# Altium PCB Main.PcbDoc (part 1 of 2)
Units mil, origin at the board's own origin, x right, y up, seen from the top; angles counter-clockwise.
Board outline 1000 x 1000 mil, 4 copper layers (Top Layer, VCC, GND, Bottom Layer), stack 62.669 mil thick; 79 components, 78 nets, 304 pads, 168 vias.
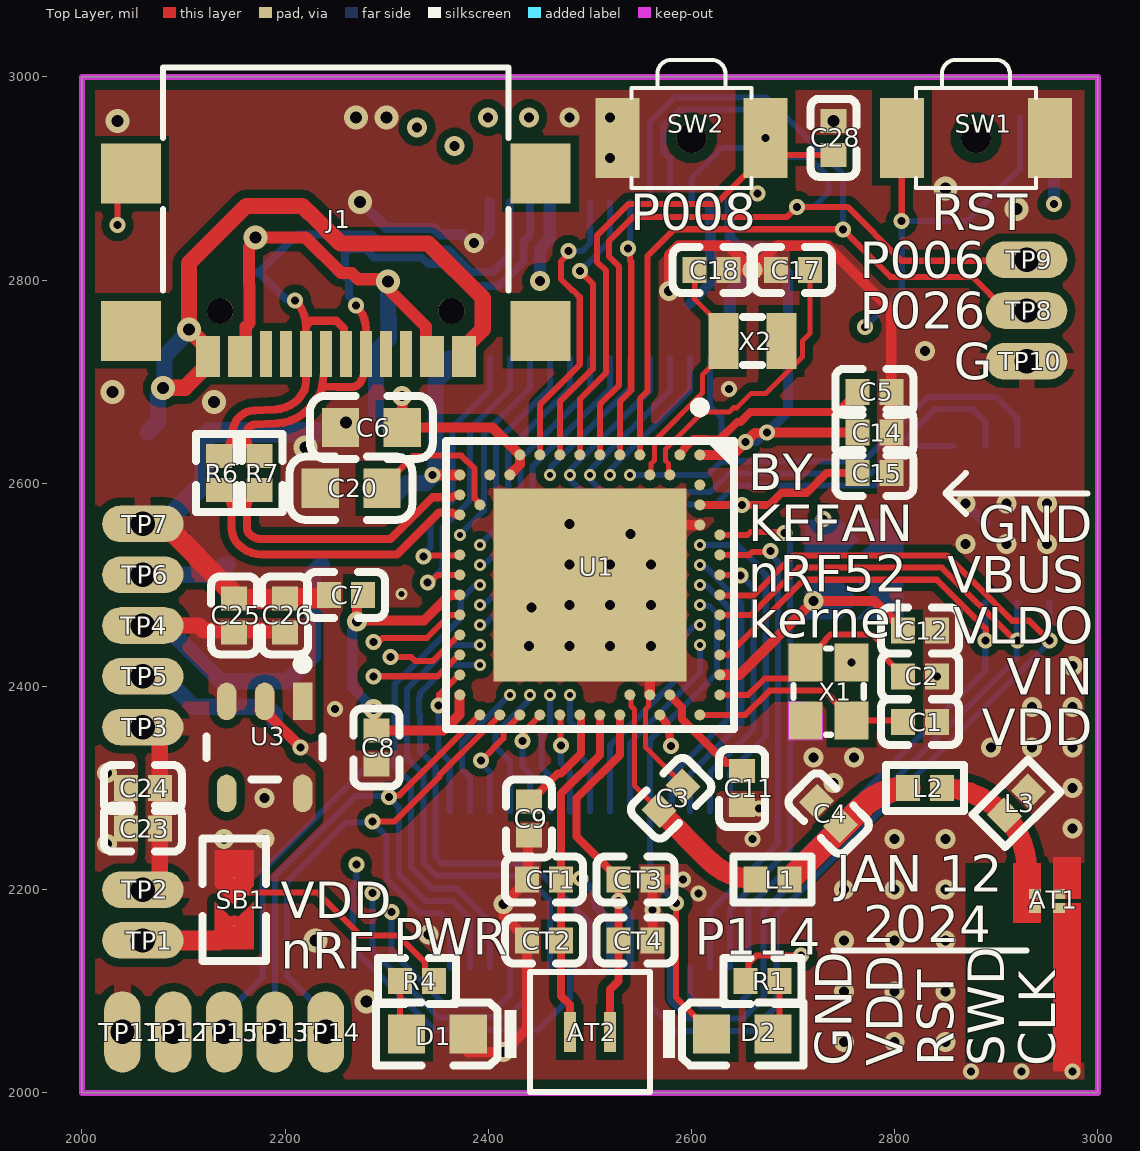
[diagram p0: Top Layer view]
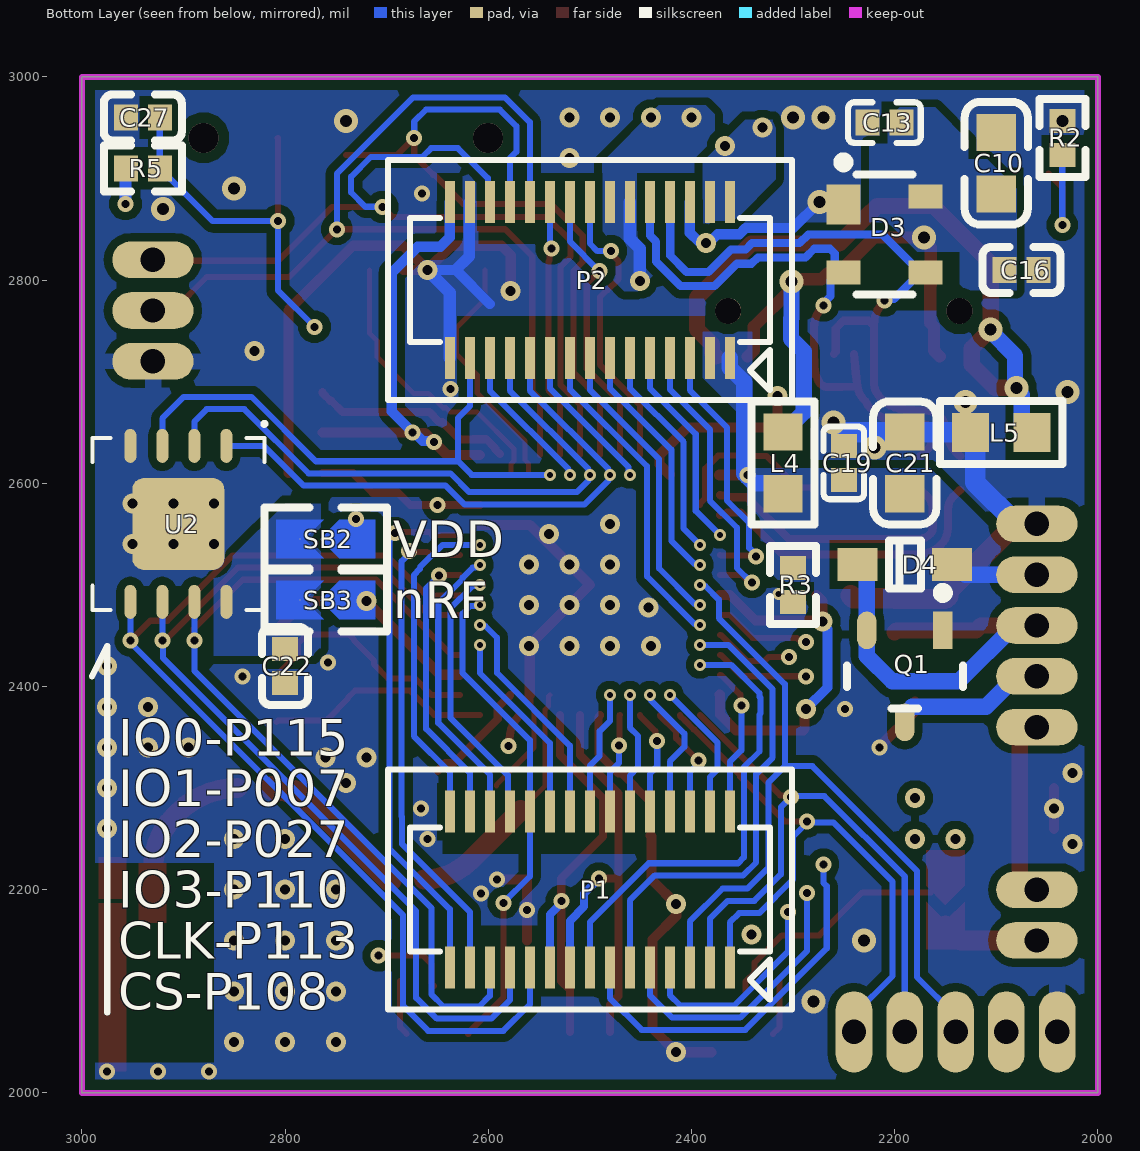
[diagram p1: Bottom Layer view, seen from below]
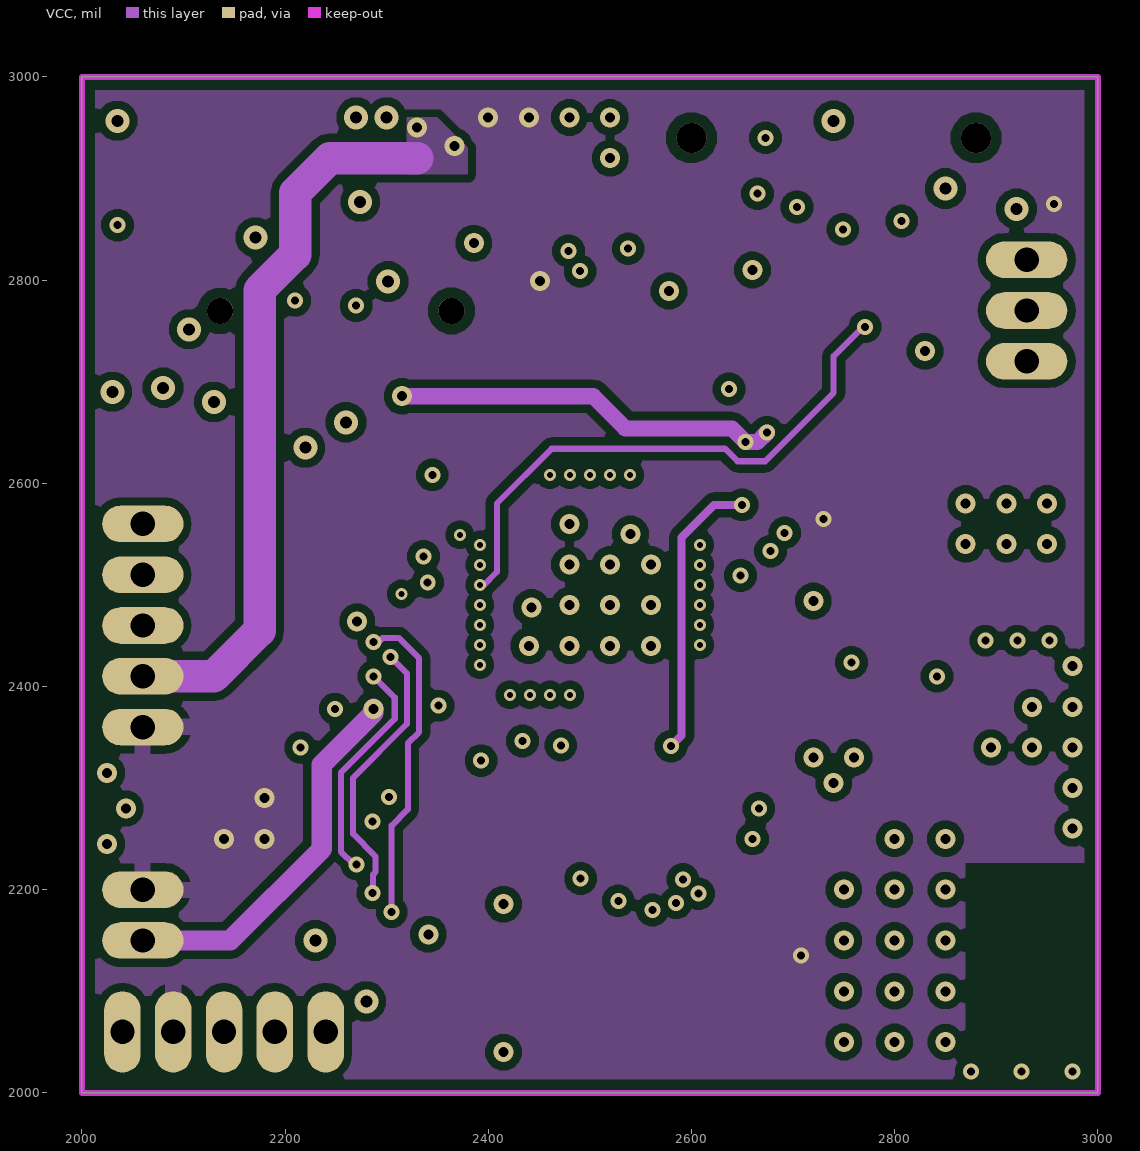
[diagram p2: VCC]
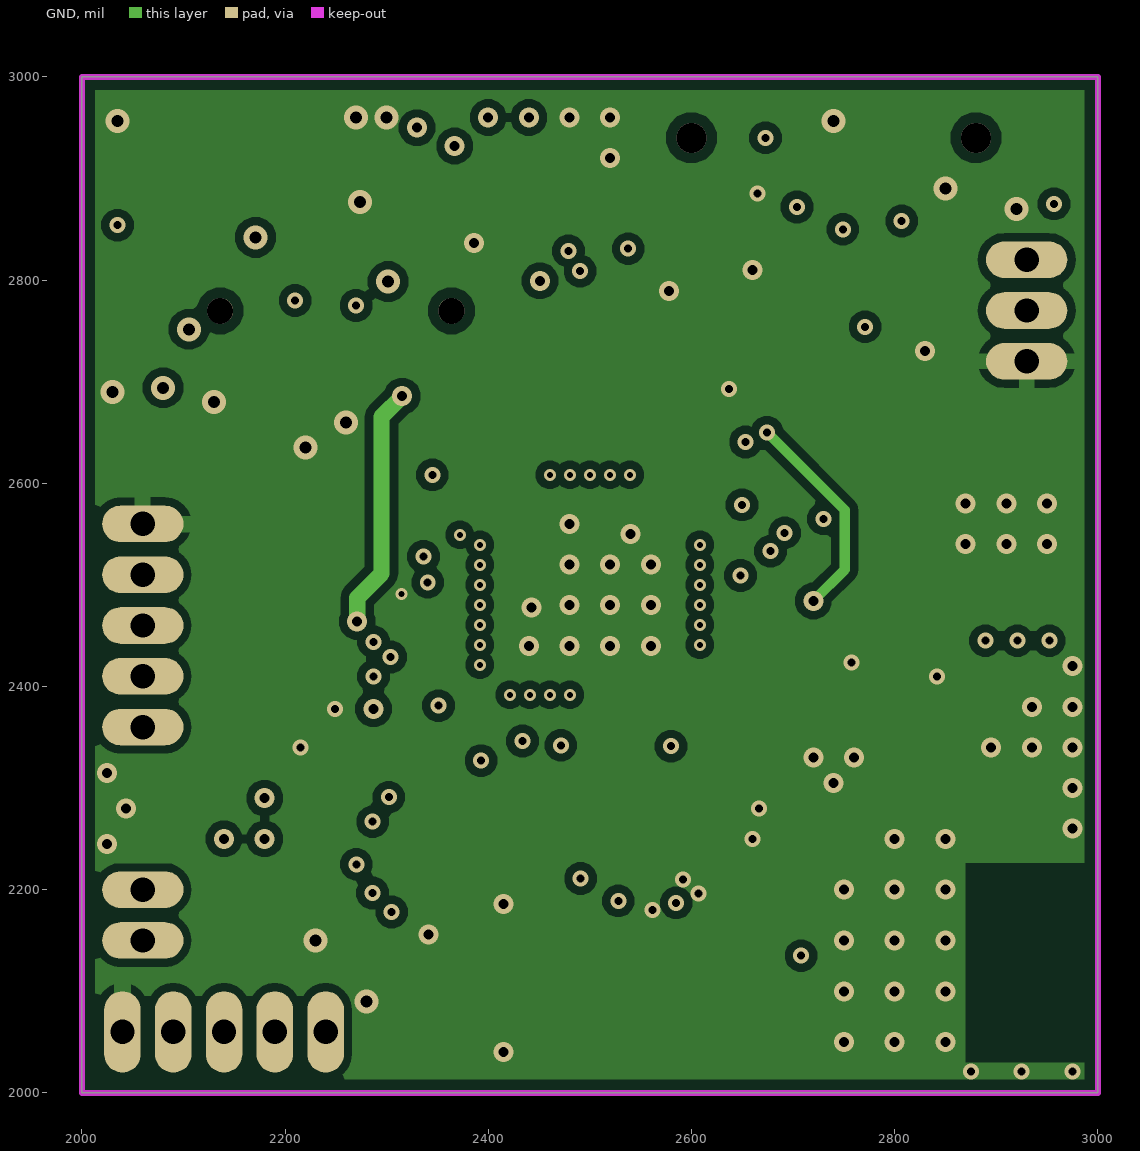
[diagram p3: GND]
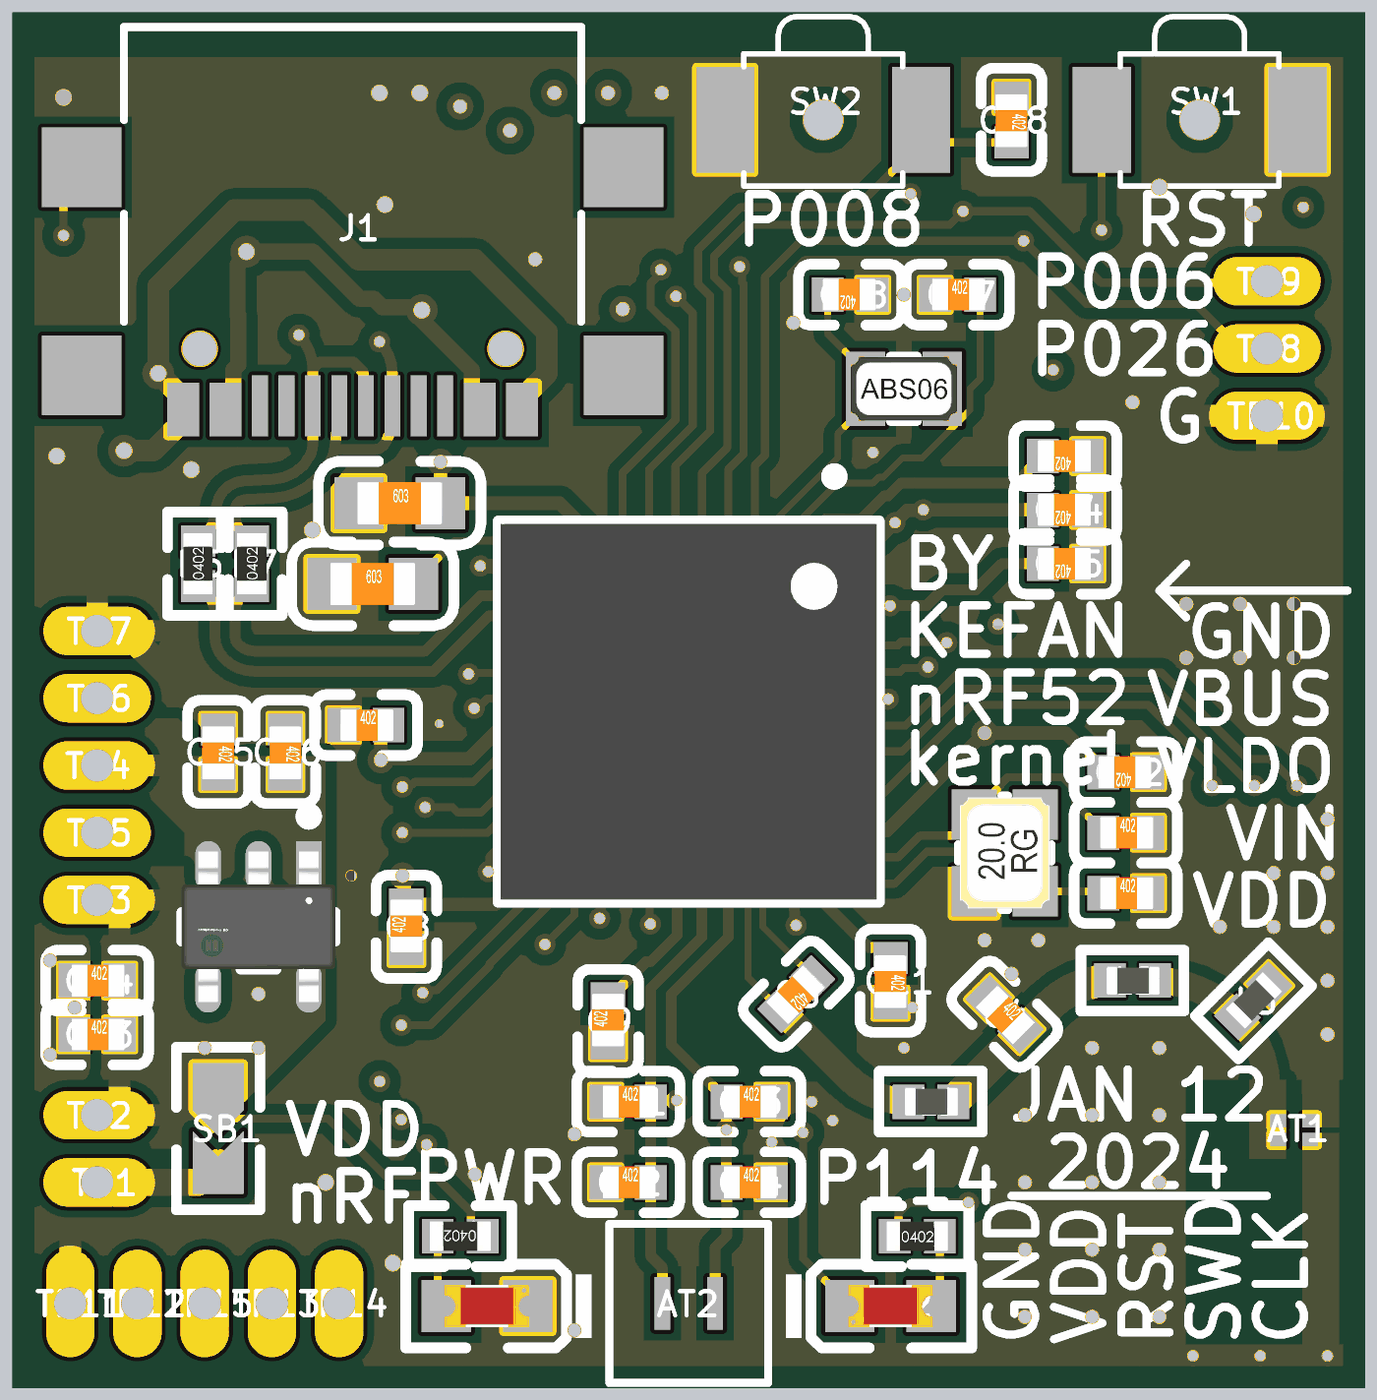
[diagram p4: 3D render of the assembled board from above, using the file's embedded part models]
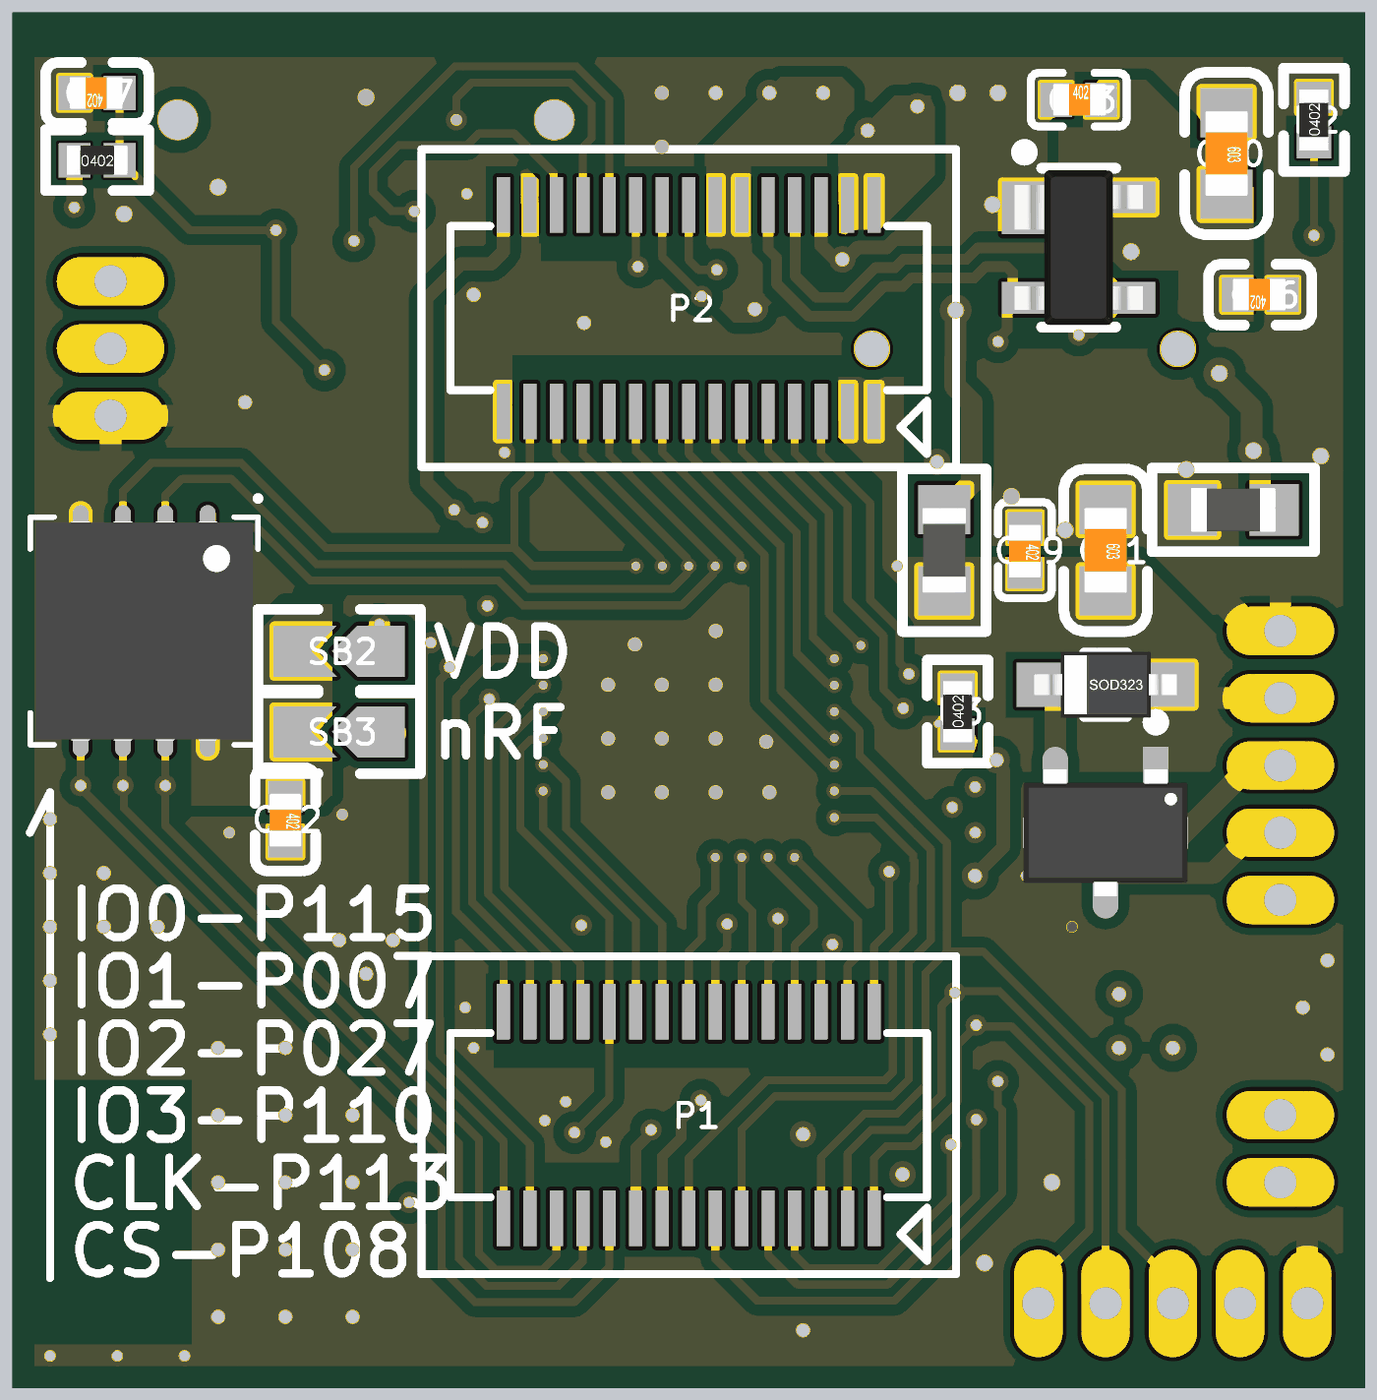
[diagram p5: 3D render of the assembled board from below, using the file's embedded part models]

## Layer stack, top to bottom
Top Solder: solder mask 0.4, Solder Resist, Dk 3.5
Top Layer: signal copper 1.378
Dielectric 2: prepreg 8.2835, PP-022, Dk 4.5
VCC: signal copper 0.7087
Dielectric 1: dielectric 41.9291, FR-4, Dk 4.8
GND: signal copper 0.7087
Dielectric 3: prepreg 8.2835, PP-022, Dk 4.5
Bottom Layer: signal copper 1.378
Bottom Solder: solder mask 0.4, Solder Resist, Dk 3.5

## Board outline
2000,2000 3000,2000 3000,3000 2000,3000

## Design rules (kind name [scope] priority, off if disabled: settings)
Clearance Polygon_ANT [(InNamedPolygon('Top_Layer-GND')) or  (InNamedPolygon('Mid_Layer_1-GND')) or (InNamedPolygon('Mid_Layer_2-GND')) or (InNamedPolygon('Bottom_Layer-GND')) vs InNet('RF')] p1: gap=10 ignorepadtopadclearanceinfootprint=FALSE
Clearance Polygon [(InNamedPolygon('Top_Layer-GND')) or  (InNamedPolygon('Mid_Layer_1-GND')) or (InNamedPolygon('Mid_Layer_2-GND')) or (InNamedPolygon('Bottom_Layer-GND'))] p2: gap=10 ignorepadtopadclearanceinfootprint=FALSE except(0: Arc-Hole Track-Hole SMDPad-Hole THPad-Hole Via-Hole Fill-Hole Poly-Hole Region-Hole Text-Hole)
Clearance Clearance_Top [OnLayer('Top Layer')] p3: gap=5.71 ignorepadtopadclearanceinfootprint=FALSE except(0: Arc-Hole Track-Hole SMDPad-Hole THPad-Hole Via-Hole Fill-Hole Poly-Hole Region-Hole Text-Hole)
Clearance [All] p4: gap=5.91 ignorepadtopadclearanceinfootprint=FALSE
ComponentClearance [All] p1 off: gap=10 collisioncheckmode=3 verticalgap=10 showdistances=FALSE
DiffPairsRouting [All] p1: maxlimit=15 minlimit=6 mostfreqgap=8 toplayer_minwidth=5 toplayer_maxwidth=20 toplayer_prefwidth=6 midlayer1_minwidth=5 midlayer1_maxwidth=20 midlayer1_prefwidth=6 midlayer2_minwidth=5 midlayer2_maxwidth=20 midlayer2_prefwidth=6 bottomlayer_minwidth=5 bottomlayer_maxwidth=20 bottomlayer_prefwidth=6 maxuncoupledlength=500
FabricationTestPointUsage TestPointUsage [All] p1: valid=0 allowmultiple=FALSE
FabricationTestpoint Testpoint [All] p1: side=3 testpointundercomponent=TRUE minsize=40 maxsize=100 preferedsize=60 minholesize=0 maxholesize=40 preferedholesize=32 testpointgrid=1 allowsidetop=TRUE allowsidebottom=TRUE usegrid=TRUE gridtolerance=0.01
Height [All] p1 off: minheight=0 maxheight=1000 prefheight=500
HoleSize [All] p1: absolutevalues=TRUE maxlimit=160 minlimit=3.94 maxpercent=80.000 minpercent=20.000
MinimumAnnularRing [All] p1 off: minimumring=6
PolygonConnect PolygonConnect_1 [isVia and innet(gnd)] p1: connectstyle=Direct reliefconductorwidth=10 reliefentries=4 polygonreliefangle="90 Angle" airgapwidth=10
PolygonConnect [All] p2: connectstyle=Relief reliefconductorwidth=10 reliefentries=4 polygonreliefangle="90 Angle" airgapwidth=10
RoutingVias [All] p1: holewidth=5.91 width=11.81 viastyle="Through Hole" minholewidth=5.91 minwidth=11.81 maxholewidth=236.22 maxwidth=248.03
SilkToSolderMaskClearance SilkscreenOverComponentPads [IsPad] p1: minsilkscreentomaskgap=10 clearancetoexposedcopper=TRUE
SolderMaskExpansion [All] p1: expansion=3 istentingtop=FALSE
Width [All] p1: maxlimit=64 minlimit=3.5 preferedwidth=5
23 further rules are at their usual default settings.

## Classes and differential pairs
component class Collection: P1 P2 R6 R7
component class Designator: C22 C23 C24 C25 C26 D4 Q1 R3 SB2 SB3 U2 U3
component class Designator: C10 C13 C16 C19 C27 C28 D1 D2 D3 J1 L4 L5 R1 R2 R4 R5 SB1 SW1 SW2 TP1 TP2 TP3 TP4 TP5 TP6 TP7 TP8 TP9 TP10 TP11 TP12 TP13 TP14 TP15
component class nRF52840_QIAA: AT1 AT2 C1 C2 C3 C4 C5 C6 C7 C8 C9 C11 C12 C14 C15 C17 C18 C20 C21 CT1 CT2 CT3 CT4 L1 L2 L3 U1 X1 X2
differential pair D: +D_P -D_N
differential pair UD: +UD_P -UD_N

## Components (designator, comment, footprint, x,y, rotation, side; value= is the part's Value field where it differs from the comment)
AT1 "2450AT07A0100" 2450AT07A0100-Footprint-1 2950.19,2188.89 r270 top locked
AT2 "NRF_ANT_TP" NRF_ANT_TP-Footprint-1 2500,2060 r180 top locked
C1 "12pF (120) 5% 50V" 0402_C 2825,2365 r0 top locked value=12pF
C2 "12pF (120) 5% 50V" 0402_C 2825,2410 r0 top locked value=12pF
C3 "1pF (1R0) 0.25pF 50V" 0402_C 2580,2290 r225 top locked value=1pF
C4 "1.2pF (1R2) 50V" 0402_C 2735,2275 r315 top locked value=1.2pF
C5 "100nF (104) 10% 16V" 0402_C 2780,2690 r180 top locked value=100nF
C6 "4.7uF (475) 10% 16V" 0603_C 2285,2655 r0 top locked value=4.7uF
C7 "100nF (104) 10% 16V" 0402_C 2260,2490 r0 top locked value=100nF
C8 "100nF (104) 10% 16V" 0402_C 2290,2340 r90 top locked value=100nF
C9 "820pF (821) 10% 50V" 0402_C 2440,2270 r90 top locked value=820pF
C10 "1uF (105) 10% 50V" 0603_C 2100,2915 r270 bottom locked value=1uF
C11 "100pF (101) 5% 50V" 0402_C 2650,2300 r270 top locked value=100pF
C12 "100nF (104) 10% 16V" 0402_C 2825,2455 r180 top locked value=100nF
C13 "100nF (104) 10% 16V" 0402_C 2210,2955 r180 bottom locked value=100nF
C14 "1uF (105) 10% 25V" 0402_C 2780,2650 r180 top locked value=1uF
C15 "1uF (105) 10% 25V" 0402_C 2780,2610 r180 top locked value=1uF
C16 "10nF (103) 10% 50V" 0402_C 2075,2810 r0 bottom locked value=10nF
C17 "12pF (120) 5% 50V" 0402_C 2700,2810 r0 top locked value=12pF
C18 "12pF (120) 5% 50V" 0402_C 2620,2810 r180 top locked value=12pF
C19 "100nF (104) 10% 16V" 0402_C 2250,2620 r270 bottom locked value=100nF
C20 "4.7uF (475) 10% 16V" 0603_C 2265,2595 r0 top locked value=4.7uF
C21 "4.7uF (475) 10% 16V" 0603_C 2190,2620 r270 bottom locked value=4.7uF
C22 "10nF (103) 10% 50V" 0402_C 2800,2420 r270 bottom locked value=10nF
C23 "10nF (103) 10% 50V" 0402_C 2060,2260 r0 top locked value=10nF
C24 "1uF (105) 10% 25V" 0402_C 2060,2300 r0 top locked value=1uF
C25 "10nF (103) 10% 50V" 0402_C 2150,2470 r270 top locked value=10nF
C26 "1uF (105) 10% 25V" 0402_C 2200,2470 r270 top locked value=1uF
C27 "1nF (102) 10% 50V" 0402_C 2940,2960 r0 bottom locked value=1nF
C28 "1nF (102) 10% 50V" 0402_C 2740,2940 r270 top locked value=1nF
CT1 "NC" 0402_C 2455,2210 r0 top locked
CT2 "NC" 0402_C 2455,2150 r0 top locked
CT3 "NC" 0402_C 2545,2210 r0 top locked
CT4 "NC" 0402_C 2545,2150 r0 top locked
D1 "0603 LED Green" 0603_LED_S1 2350,2058 r180 top locked
D2 "0603 LED Green" 0603_LED_S1 2650,2058 r0 top locked
D3 "PRTR5V0U2X" SOT190P230X110-4L 2210,2845 r180 bottom locked
D4 "1N5819WS" SOD-323 2190,2520 r180 bottom locked
J1 "TYPEC-304YSSW-ACP16" TYPEC-304YSSW-ACP16 2250,2750 r180 top locked
L1 "4.7nH" 0402_L 2680,2210 r0 top locked
L2 "2.2nH" 0402_L 2830,2300 r0 top locked
L3 "2.7nH" 0402_L 2920,2285 r45 top locked
L4 "LQW18AN3N9C10D" 0603_L 2310,2620 r270 bottom locked value=3.9nH
L5 "LQW18AN3N9C10D" 0603_L 2095,2650 r0 bottom locked value=3.9nH
P1 "DF23C-30DP-0.5V" DF23C-30DP-0.5V 2500,2200 r180 bottom locked
P2 "DF23C-30DP-0.5V" DF23C-30DP-0.5V 2500,2800 r180 bottom locked
Q1 "SSM3J328R" SOT-23-3L 2190,2410 r90 bottom locked
R1 "470Ω (4700) ±1%" 0402_R 2670,2110 r0 top locked value=470¦¸
R2 "100KΩ (1003) ±1%" 0402_R 2035,2940 r90 bottom locked value=100K¦¸
R3 "100KΩ (1003) ±1%" 0402_R 2300,2500 r90 bottom locked value=100K¦¸
R4 "470Ω (4700) ±1%" 0402_R 2330,2110 r180 top locked value=470¦¸
R5 "100KΩ (1003) ±1%" 0402_R 2940,2910 r180 bottom locked value=100K¦¸
R6 "22Ω (22R0) ±1%" 0402_R 2135,2610 r90 top locked value=22¦¸
R7 "22Ω (22R0) ±1%" 0402_R 2175,2610 r90 top locked value=22¦¸
SB1 "10Ω" 0603-Fuse 2150,2190 r270 top locked
SB2 "0Ω" 0603-Fuse 2760,2545 r0 bottom locked
SB3 "NC" 0603-Fuse 2760,2485 r0 bottom locked
SW1 "TS-1063S-B3D4" TS-1063S-B3D4 2880,2940 r180 top locked
SW2 "TS-1063S-B3D4" TS-1063S-B3D4 2600,2940 r180 top locked
TP1 "Test Point" TP_H_24_80_36 2060,2150 r0 top locked net-tie
TP2 "Test Point" TP_H_24_80_36 2060,2200 r0 top locked net-tie
TP3 "Test Point" TP_H_24_80_36 2060,2360 r180 top locked net-tie
TP4 "Test Point" TP_H_24_80_36 2060,2460 r180 top locked net-tie
TP5 "Test Point" TP_H_24_80_36 2060,2410 r180 top locked net-tie
TP6 "Test Point" TP_H_24_80_36 2060,2510 r180 top locked net-tie
TP7 "Test Point" TP_H_24_80_36 2060,2560 r180 top locked net-tie
TP8 "Test Point" TP_H_24_80_36 2930,2770 r0 top locked net-tie
TP9 "Test Point" TP_H_24_80_36 2930,2820 r0 top locked net-tie
TP10 "Test Point" TP_H_24_80_36 2930,2720 r0 top locked net-tie
TP11 "Test Point" TP_H_24_80_36 2040,2060 r90 top locked net-tie
TP12 "Test Point" TP_H_24_80_36 2090,2060 r90 top locked net-tie
TP13 "Test Point" TP_H_24_80_36 2190,2060 r90 top locked net-tie
TP14 "Test Point" TP_H_24_80_36 2240,2060 r90 top locked net-tie
TP15 "Test Point" TP_H_24_80_36 2140,2060 r90 top locked net-tie
U1 "nRF52840-QIAA" AQFN50P700X700X85_HS-74N 2500,2500 r270 top locked
U2 "W25Q64JVXGIQ" W25Qxx-xSON127P600-8N 2905,2560 r270 bottom locked
U3 "NCP718ASN300" SOT-23-5L 2180,2340 r90 top locked
X1 "32MHz 12pF" XTAL_2016_4P 2735,2395 r90 top locked
X2 "32.768kHz, 12pF" XTAL_2012_2P 2660,2740 r0 top locked

## Footprints (in the part's own frame and the unit in brackets; to place one, negate y for a bottom-side part, rotate by r counter-clockwise, add the part's x,y. Pads: shape width x height; smd on the part's side, far side on the other; paste and mask are expansions set on the pad)
0402_C [mm]
  rect 0.6x0.65 smd mask+0.051: 1(-0.425,0) 2(0.425,0)
  silkscreen extent -0.97,-0.58 0.97,0.58, body extent -0.48,-0.3 0.52,0.3, height 0.2
0402_L [mm]
  rect 0.6x0.65 smd mask+0.051: 1(-0.425,0) 2(0.425,0)
  silkscreen extent -0.97,-0.58 0.97,0.58, body extent -0.51,-0.26 0.54,0.26, height 0.36
0402_R [mm]
  rect 0.6x0.65 smd mask+0.051: 1(-0.425,0) 2(0.425,0)
  silkscreen extent -0.97,-0.58 0.97,0.58, body extent -0.57,-0.27 0.58,0.28, height 0.41
0603-Fuse [mil]
  round 1 smd: 1(-21.6,0) 2(25.2,0)
  Top Layer region: -48.6,-19 -13.6,-19 5.4,0 -13.6,19 -48.6,19
  Top Layer region: 20.7,0 1.7,19 48.7,19 48.7,-19 1.7,-19
  silkscreen extent -60,-31 60,31
0603_C [mm]
  rect 0.93x0.98 smd: 1(-0.77,0) 2(0.77,0)
  silkscreen extent -1.53,-0.79 1.54,0.79, body extent -0.8,-0.4 0.8,0.4, height 0.3
0603_L [mm]
  rect 0.93x0.98 smd: 1(-0.77,0) 2(0.77,0)
  silkscreen extent -1.53,-0.79 1.54,0.79, body extent -0.8,-0.41 0.8,0.41, height 0.46
0603_LED_S1 [mm]
  rect 0.93x0.98 smd: A(0.77,0) K(-0.77,0)
  silkscreen extent -1.98,-0.79 1.54,0.79, body extent -0.8,-0.4 0.8,0.4, height 0.6
2450AT07A0100-Footprint-1 [mm]
  rect 0.25x0.3 smd: 1(0.175,-0.3) 2(0.175,0.3) 3(-0.175,0.3) 4(-0.175,-0.3)
  Top Layer region: -0.95,-0.85 0.55,-0.85 0.55,-0.15 -0.95,-0.15
  Top Layer region: -0.965,0.15 -0.05,0.15 -0.05,0.85 -0.965,0.85
  Top Layer region: 0.05,0.15 4.064,0.15 4.064,0.85 0.05,0.85
  Multi-Layer pour cut-out: -0.95,0.95 -0.95,-2.05 4.05,-2.05 4.05,0.95
  body extent -0.25,-0.5 0.25,0.5, height 0.36
AQFN50P700X700X85_HS-74N [mm] "AQFN, 73-Leads, Body 7.00x7.00mm, Pitch 0.50mm, Thermal Pad 4.95x4.95mm, IPC Medium Density. Standard"
  rect 4.826x4.826 smd: 74(0,0)
  round 0.275 smd paste+0.012 mask+0.05: A8(-1.25,3.25) A10(-0.75,3.25) A12(-0.25,3.25) A14(0.25,3.25) A16(0.75,3.25) A18(1.25,3.25) A20(1.75,3.25) A22(2.25,3.25) A23(2.75,3.25) AA24(3.25,-2.25) AB2(-2.75,-2.5) AC5(-2,-2.75) AC9(-1,-2.75) AC11(-0.5,-2.75) AC13(0,-2.75) AC15(0.5,-2.75) AC17(1,-2.75) AC19(1.5,-2.75) AC21(2,-2.75) AC24(3.25,-2.75) AD2(-2.75,-3.25) AD4(-2.25,-3.25) AD6(-1.75,-3.25) AD8(-1.25,-3.25) AD10(-0.75,-3.25) AD12(-0.25,-3.25) AD14(0.25,-3.25) AD16(0.75,-3.25) AD18(1.25,-3.25) AD20(1.75,-3.25) AD22(2.25,-3.25) AD23(2.75,-3.25) B1(-3.25,2.75) B3(-2.5,2.75) B5(-2,2.75) B7(-1.5,2.75) B9(-1,2.75) B11(-0.5,2.75) B13(0,2.75) B15(0.5,2.75) B17(1,2.75) B19(1.5,2.75) B24(3.25,2.75) C1(-3.25,2.25) D2(-2.75,2) D23(2.75,2) E24(3.25,1.75) F2(-2.75,1.5) F23(2.75,1.5) G1(-3.25,1.25) H2(-2.75,1) H23(2.75,1) J1(-3.25,0.75) J24(3.25,0.75) K2(-2.75,0.5) L1(-3.25,0.25) L24(3.25,0.25) M2(-2.75,0) N1(-3.25,-0.25) N24(3.25,-0.25) P2(-2.75,-0.5) P23(2.75,-0.5) R1(-3.25,-0.75) R24(3.25,-0.75) T2(-2.75,-1) T23(2.75,-1) U1(-3.25,-1.25) U24(3.25,-1.25) V23(2.75,-1.5) W1(-3.25,-1.75) W24(3.25,-1.75) Y2(-2.75,-2) Y23(2.75,-2)
  silkscreen extent -4.56,-3.6 3.6,3.6, body extent -3.55,-3.55 3.55,3.55, height 0.85
DF23C-30DP-0.5V [mm]
  rect 0.25x1.05 smd: 1(3.5,-1.95) 2(3.5,1.95) 3(3,-1.95) 4(3,1.95) 5(2.5,-1.95) 6(2.5,1.95) 7(2,-1.95) 8(2,1.95) 9(1.5,-1.95) 10(1.5,1.95) 11(1,-1.95) 12(1,1.95) 13(0.5,-1.95) 14(0.5,1.95) 15(0,-1.95) 16(0,1.95) 17(-0.5,-1.95) 18(-0.5,1.95) 19(-1,-1.95) 20(-1,1.95) 21(-1.5,-1.95) 22(-1.5,1.95) 23(-2,-1.95) 24(-2,1.95) 25(-2.5,-1.95) 26(-2.5,1.95) 27(-3,-1.95) 28(-3,1.95) 29(-3.5,-1.95) 30(-3.5,1.95)
  silkscreen extent -5.05,-3 5.05,3, body extent -4.5,-1.5 4.5,1.5, height 1.45
NRF_ANT_TP-Footprint-1 [mm]
  rect 0.3x1 smd: 1(-0.5,0) 2(0.5,0)
  silkscreen extent -1.5,-1.5 1.5,1.5
SOD-323 [mm]
  rect 1x0.83 smd: 1(1.18,0) 2(-1.18,0)
  silkscreen extent -0.4,-0.6 0.4,0.6, body extent -1.35,-0.63 1.35,0.63, height 1.1
SOT190P230X110-4L [mm] "SOT143, 4-Leads, Body 3.0x2.5mm (max), Pitch 1.90mm, IPC High Density"
  rect 0.85x1 smd: 1(-1.025,0.75)
  rect 0.85x0.6 smd: 2(-1.025,-0.95) 3(1.025,-0.95) 4(1.025,0.95)
  silkscreen extent -1.15,-1.5 0.7,1.92, body extent -1.21,-1.46 1.21,1.46, height 1
SOT-23-3L [mm] "http://www.aosmd.com/res/packaging_information/SOT-23-3L.pdf"
  rect 0.94x0.486 smd paste+0 mask+0: 1(1.15,-0.95)
  rrect100% 0.94x0.486 smd paste+0 mask+0: 2(1.15,0.95) 3(-1.15,0)
  silkscreen extent -0.8,-1.45 2.21,1.45, body extent -1.2,-1.55 1.2,1.55, height 0.88
SOT-23-5L [mm]
  rect 0.94x0.486 smd paste+0 mask+0: 1(1.15,-0.95)
  rrect100% 0.94x0.486 smd paste+0 mask+0: 2(1.15,0) 3(1.15,0.95) 4(-1.15,0.95) 5(-1.15,-0.95)
  silkscreen extent -0.8,-1.45 2.21,1.45, body extent -1.42,-1.45 1.42,1.45, height 1
TP_H_24_80_36 [mil]
  oval 80x36 hole 24: 1(0,0)
TS-1063S-B3D4 [mm] "Side push, surface mount, button"
  rect 1.1x2 smd: 1(1.85,0) 2(-1.85,0)
  silkscreen extent -1.5,-1.95 1.5,1.25, body extent -1.5,-1.95 1.5,1.25, height 1.3
TYPEC-304YSSW-ACP16 [mm] "USB Type-C"
  round 0.65 hole 0.65: 0(-2.89,-0.5) 0(2.89,-0.5)
  rect 1.5x1.5 smd: 1(-5.12,0) 2(5.12,0) 3(-5.12,-3.93) 4(5.12,-3.93)
  rect 0.6x1.016 smd: A1(-3.2,0.642) A4(-2.4,0.642) A9(2.4,0.642) A12(3.2,0.642)
  rect 0.3x1.15 smd: A5(-1.25,0.575) A6(-0.25,0.575) A7(0.25,0.575) A8(1.25,0.575) B5(1.75,0.575) B6(0.75,0.575) B7(-0.75,0.575) B8(-1.75,0.575)
  silkscreen extent -4.32,-6.58 4.32,-1.02, body extent -4.32,-6.6 4.32,0.25, height 2.54
W25Qxx-xSON127P600-8N [mm]
  oval 0.85x0.3 smd: 1(-1.95,1.2) 2(-1.95,0.4) 3(-1.95,-0.4) 4(-1.95,-1.2) 5(1.95,-1.2) 6(1.95,-0.4) 7(1.95,0.4) 8(1.95,1.2)
  rrect25% 2.3x2.3 smd: 9(0,0)
  silkscreen extent -2.55,-2.15 2.15,2.2, body extent -2.07,-2.05 2.07,2.05, height 0.5
XTAL_2012_2P [mm] "XTAL SMD 2.0 x 1.2 mm"
  rect 0.75x1.4 smd: 1(-0.725,0) 2(0.725,0)
  silkscreen extent -0.24,-0.6 0.24,0.6, body extent -1,-0.61 1,0.61, height 0.6
XTAL_2016_4P [mm] "Crystal 2.0 x 1.6 mm"
  rect 0.95x0.85 smd: 1(-0.725,-0.575) 2(-0.725,0.575) 2(0.725,-0.575) 3(0.725,0.575)
  Top Layer keep-out lines w0.01: -0.25,0.65 -0.25,1 -1.2,1 -1.2,0.15 -0.55,0.15
  silkscreen extent -1.08,-0.88 1.08,0.88, body extent -1.05,-0.85 1.05,0.85, height 0.56

## Part data
AT1: library part CMP-00025-00003-1, "2.4GHz Chip RF Antenna 2.4GHz ~ 2.5GHz 1dBi Solder Surface Mount", Frequency=2.4GHz, Max Operating Temperature=125¡ãC, Min Operating Temperature=-40¡ãC, Impedance=50¦¸, Mounting Technology=SMD, Pins=4, RoHS Compliant=Yes
AT2: library part CMP-00025-00004-1, "NRF Antenna Testpoint", Pins=2
C1 C2 C17 C18: library part "0402 12pF (120) 5% 50V", "Chip Capacitor", Package=0402, Voltage=50V
C3: library part "0402 1pF (1R0) 0.25pF 50V", "Chip Capacitor", Voltage=50V
C4: library part "0402 1.2pF (1R2) 50V", "Chip Capacitor", Voltage=50V
C5 C7 C8 C12 C13 C19: library part "0402 100nF (104) 10% 16V", "Chip Capacitor", Voltage=16V
C6 C20 C21: library part "0603 4.7uF (475) 10% 16V", "Chip Capacitor", Package=0603, Voltage=16V, ComponentLink1Description=¹©Ó¦ÉÌÁ´½Ó, ComponentLink1URL=http://www.szlcsc.com/product/details_20375.html
C9: library part "0402 820pF (821) 10% 50V", "Chip Capacitor", Voltage=50V
C10: library part "0603 1uF (105) 10% 50V", "Chip Capacitor", Package=0603, Voltage=50V
C11: library part "0402 100pF (101) 5% 50V", "Chip Capacitor", Voltage=50V
C14 C15 C24 C26: library part "0402 1uF (105) 10% 25V", "Chip Capacitor", Voltage=25V
C16 C22 C23 C25: library part "0402 10nF (103) 10% 50V", "Chip Capacitor", Package=0402, Voltage=50V
C27 C28: library part "0402 1nF (102) 10% 50V", "Chip Capacitor", Voltage=50V
CT1 CT2 CT3 CT4: library part "0402 Capacitor Testpoint", "Chip Capacitor Testpoint"
D1 D2: "Green LED", Color=Green, Package=0603
D3: "Ultra low capacitance double rail-to-rail ESD protection diode", Manufacturer="NXP Semiconductors", Part number IPS=00000009951, Part number Norautron=N.A., Supplier Part Number 1=568-4140-1-ND, Artikkelnr Noca=10069015, Author=rsk, Component Class=Semiconductors, ComponentLink1Description=Datasheet, ComponentLink1URL=N.A., ComponentLink2Description="Supplier link", ComponentLink2URL=N.A., Footprint Doc=SOT-143B, HelpURL=http://www.farnell.com/datasheets/109718.pdf, LatestRevisionDate=2017-11-09, Manufacturer Part Number=PRTR5V0U2X, Note=N.A., Pad Count=4, Part Number=PRTR5V0U2X, PartId=101300082, Pin Count=4, Published=2012-06-11, Publisher="Nordic Semiconductor", Supplier 1=Digi-Key, Supplier 2=Farnell, Supplier Part Number 2=152-4157
D4: JLCPCB Part Number=C191023, Maximum Average Forward Rectified Current=1A, Maximum Forward Voltage=1V, ComponentLink1Description=Datasheet, ComponentLink1URL=https://datasheet.lcsc.com/lcsc/2204281430_Guangdong-Hottech-1N5819WS_C191023.pdf
J1: "5A16PIN TYPEC"
L1: library part "0402 4.7nH 0.3nH", "Chip Inductor", ComponentLink1Description=¹©Ó¦ÉÌÁ´½Ó, ComponentLink1URL=http://www.szlcsc.com/product/details_14246.html
L2: library part "0402 2.2nH", "Chip Inductor"
L3: library part "0402 2.7nH 0.3nH", "Chip Inductor"
L4 L5: "1A 3.9nH 32m¦¸ 0603  Inductors (SMD) ROHS", Current=1A, DC Resistance=32m¦¸, Package=0603
Q1: "20V 6A 29.8m¦¸@4.5V,3A 1W P Channel SOT-23(TO-236)  MOSFETs ROHS", Package=SOT-23F, SuppliersPartNumber=C15127, ComponentLink1Description=¹©Ó¦ÉÌÁ´½Ó, ComponentLink1URL=http://www.szlcsc.com/product/details_15801.html, Supplier=LC
R1 R4: library part "0402 470¦¸ (4700) 1%", "Chip Resistor", Package=0402
R2 R3 R5: library part "0402 100K¦¸ (1003) 1%", "Chip Resistor", Package=0402
R6 R7: library part "0402 22¦¸ (22R0) 1%", "Chip Resistor"
SB1: library part Test-Fuse, "Fuse easy soldering for test, with 10¦¸ 0603 Resistor soldered"
SB2 SB3: library part Test-Fuse, "Fuse easy soldering for test"
SW1 SW2: "SPST 250gf@¡À30gf -  Tactile Switches ROHS"
TP1 TP2 TP3 TP4 TP5 TP6 TP7 TP8 TP9 TP10 TP11 TP12 TP13 TP14 TP15: library part Test-Point
U1: "Multi-protocol Bluetooth Low Energy, IEEE 802.15.4, ANT and 2.4GHz proprietary system-on-chip", Footprint Doc=AQFN-73, LatestRevisionDate=2017-08-21, Pad Count=73, Part Number=nRF52840-QIAA, Published=2017-08-21
U2: "3V 64M-Bit Serial Flash Memory with Dual/Quad SPI & QPI, 2.7 to 3.6 V, -40 to 85 degC, 8-Pin XSON, RoHS, Tape and Reel", Manufacturer=Winbond, Manufacturer Part Number=W25Q64FVSSIG, Operating Supply Voltage (Max)=3.6V, Operating Supply Voltage (Min)=2.7V, Operating Supply Voltage (Typ)=3/3.3V, Operating Temp Range=-40Cto85C, Operating Temperature (Max)=85C, Operating Temperature (Min)=-40C, Operating Temperature Classification=Industrial, Package Description="8-Pin Small Outline Integrated Circuit, Body 5.28 x 5.28 mm, Pitch 1.27 mm", Package Reference=SS-8, Package Type=SOIC, Program/Erase Volt (Typ)=2.7to3.6V, Supply Current=40mA, Access Time (Max)=8.5ns, Address Bus=1b, Boot Type=Bottom/Top, Cell Type=NOR, Datasheet URL=https://datasheet.ciiva.com/15126/getdatasheetpartid-552937-15126648.pdf, Datasheet Version="Rev. D, 12/2011", Density=67108864Bit, Interface Type=Serial(SPI), Manufacturer URL=http://www.winbond.com/hq/index.html?__locale=en, Mounting=SurfaceMount, Number of Words=8M, Pin Count=8, Programmable=Yes, Rad Hardened=No, Sync/Async=Synchronous, Word Size=8b
U3: "3V LDO 300 MA LOW IQ WIDE INPUT", Dropout Voltage=480mV, Manufacturer="On Semiconductor", Manufacturer Part Number=NCP718BSNADJT1G, Max Junction Temp=+125¡ãC, Max Supply Voltage=24V, Min Supply Voltage=2.5V, Nominal Supply Current=50-300uA, Output Current=300mA, Output Voltage=1.2-5V, Package=419AE-01, Temperature="to +125¡ãC", Accuracy Percentage=2%, Automotive=No, Category=IC, ComponentLink2Description=Datasheet, ComponentLink2URL=https://www.onsemi.com/pub/Collateral/NCP718-D.PDF, Device Class L1="Integrated Circuits (ICs)", Device Class L2="Power Management ICs", Device Class L3="Voltage Regulators - Linear", Digikey Description="300 MA LOW IQ WIDE INPUT", Height=1mm, Lead Free=Yes, Mouser Description="LDO Regulator, 300 mA, Wide Vin, Ultra-Low Iq Adjustable, Non-Active Discharge, TSOT23-5", Number Of Outputs=1, Octopart=https://octopart.com/ncp718bsnadjt1g-on+semiconductor-87658781, Output Type=AdjustableProgrammable, RoHS=TRUE, Standoff Height=0.01mm, Temperature Range High=+125¡ãC
X1: library part XTAL_SMD2016_32MHz_12pF, "XTAL SMD 2016, 32MHz, Cl=12pF, Total Tol: ¡À20ppm", Frequency=32MHz, Pins=4
X2: library part XTAL_SMD2012_32.768kHz_12pF, "32.768kHz 12pF ¡À20ppm SMD2012-2P  Crystals ROHS", Frequency=32.768kHz, Component Class=Oscillators, Pad Count=2

## Via types
v1: diameter 19.68, hole 9.84, Top Layer to Bottom Layer, tented both sides, 69 vias
v2: diameter 15.75, hole 7.87, Top Layer to Bottom Layer, tented both sides, 56 vias
v3: diameter 11.81, hole 5.91, Top Layer to Bottom Layer, tented both sides, 24 vias
v4: diameter 23.62, hole 11.81, Top Layer to Bottom Layer, tented both sides, 17 vias
v5: diameter 29.53, hole 29.53, Top Layer to Bottom Layer, tented both sides, 2 vias

## Nets (pads, with @x,y where several pads share a name; then routed paths per layer and width w, separated by ;. In a path a pad name is that pad's centre, name@x,y a point inside that pad or via, vN(x,y) a via of type N, cw(c..) or ccw(c..) an arc to the next point about the centre after c; other vN are vias at no path point)
D_N: R7.1 U1.AD4 | length 275.2
  Top Layer w8: R7.1 ccw(c2175,2590.89) 2173.32,2592.57 2168.26,2587.51 ccw(c2182.16,2573.61) 2162.5,2573.61 2162.5,2556.04 ccw(c2171.04,2556.04) 2165,2550 ccw(c2177.07,2562.07) 2177.07,2545 2279.64,2545 2303.95,2545 2345.19,2586.24 2364.76,2586.24 2366.57,2588.04 2371.51,2588.04 U1.AD4
D_P: R6.1 U1.AD6 | length 298.7
  Top Layer w8: R6.1 cw(c2135,2590.89) 2136.68,2592.57 2141.74,2587.51 cw(c2127.84,2573.61) 2147.5,2573.61 2147.5,2556.04 ccw(c2171.04,2556.04) 2154.39,2539.39 ccw(c2177.07,2562.07) 2177.07,2530 2279.64,2530 2310.16,2530 2351.4,2571.24 2364.76,2571.24 2366.57,2569.44 2371.51,2569.44 U1.AD6
DCC: U1.B3
DEC1: C5.2 U1.C1 | length 201.7
  Top Layer w8: U1.C1@2588.58,2628.72 2592.85,2632.99 2592.85,2634.34 2601.88,2643.37 2614.65,2643.37 2615.02,2643 2627.78,2643 2645.14,2660.36 2648.3,2660.36 2657.94,2670 2743.27,2670 2754.47,2681.2 2755.46,2681.2 2763.27,2689.02 C5.2
DEC2: U1.A18
DEC3: C11.1 U1.D23 | length 109.3
  Top Layer w8: U1.D23 2578.74,2390.97 2590.59,2379.11 2590.59,2367.92 2633.97,2324.54 2642.19,2324.54 C11.1
DEC4_6: C15.2 U1.B5 U1.E24 | length 484.5
  Top Layer w8: U1.E24 cw(c2544.51,2347.66) 2579,2347.66 2579,2342 v2(2579.85,2341.15) ; U1.B5 v2(2649.74,2578.74) 2676.79,2578.74 2688.73,2590.68 2713.68,2590.68 2733,2610 C15.2
  VCC w8: v2(2579.85,2341.15) 2590.36,2351.67 2590.36,2546.79 2622.32,2578.74 v2(2649.74,2578.74)
GND: AT1.2 AT1.3 C1.2 C2.2 C3.1 C4.1 C5.1 C6.1 C7.1 C8.1 C9.1 C10.1 C11.2 C12.1 C13.1 C14.1 C15.1 C16.1 C17.1 C18.1 C19.1 C20.1 C21.1 C22.2 C23.1 C24.1 C25.1 C26.1 C27.2 C28.1 CT1.1 CT2.1 CT3.2 CT4.2 D1.K D3.1 L3.2 L5.2 P2.6 P2.28 P2.29 R2.2 R3.1 SW1.2 SW2.1 TP7.1 TP10.1 TP11.1 U1.74 U1.B7 U1.F23 U2.4 U2.9 U3.2 X1.2 | length 2281.9
  Top Layer w5: U1.F23 2557.94,2390.62 2557.94,2380.77 2554.98,2377.81 2554.98,2340.03 2591.83,2303.18 C3.1
  Top Layer w10: C23.1 C24.1 ; U3.2 2180,2375.67 2215,2340.67 v2(2215,2340) ; D1.K@2380.31,2040 v1(2415,2040) 2438.27,2063.27 CT2.1 2438.27,2150.98 2415,2174.25 v1(2415,2185.75) 2438.27,2209.02 CT1.1 2439.13,2210.87 2439.13,2252.4 C9.1 ; U1.F23 2559.06,2440.94 U1.74 2559.06,2559.06 U1.B7 ; CT4.2 v2(2561.73,2180) CT3.2 v2(2591.52,2210) ; v1(2577.84,2789.1) 2577.84,2824.74 2586.9,2833.8 2636.2,2833.8 v1(2660,2810) ; C18.1 v1(2660,2810) ; C17.1 v1(2660,2810) ; C15.1 C14.1 C5.1 2796.73,2770.16 2733.1,2833.8 2683.8,2833.8 v1(2660,2810)
  Top Layer w20: TP7.1 2080.91,2560 2147.2,2493.71 2147.2,2488.54 2149.02,2486.73 C25.1 ; C25.1@2150.61,2486.13 C26.1@2199.39,2486.13 ; C26.1 2240.98,2486.73 2243.27,2489.02 C7.1
  Bottom Layer w6: P2.6@2399.65,2878.69 P2.6
  Bottom Layer w10: v4(2274,2877) 2299.68,2851.32 2346.5,2851.32 2352.73,2845.1 2374.32,2845.1 2383.16,2836.27 v1(2385.78,2836.27) 2387.63,2838.12 2393.1,2838.12 2401.57,2846.6 P2.6 ; 2598.43,2776.43 2632,2810 v1(2660,2810) ; U2.9@2865.33,2581.33 2867,2583 U2.9@2890,2560
  Bottom Layer w11: P2.28 2618.69,2876.19 2618.69,2823.31 2632,2810
  Bottom Layer w12: P2.29 2637.8,2787.8 v1(2660,2810)
  Bottom Layer w20: TP7.1 2080,2560 2120.71,2600.71 2120.71,2645.39 L5.2 2125.47,2650.16 2249.84,2650.16 2250,2650.32
  other v1: 2750,2050 2800,2050 2850,2050 2750,2100 2800,2100 2850,2100 2750,2150 2800,2150 2850,2150 2341,2156 2750,2200 2800,2200 2850,2200 2025,2245 2800,2250 2850,2250 2975,2260 2043.27,2280 2975,2300 2740,2305 2025,2315 2720,2330 2760,2330 2895,2340 2935,2340 2975,2340 2935,2380 2975,2380 2975,2420 2440,2440 2480,2440 2520,2440 2560,2440 2442.4,2477.6 2480,2480 2520,2480 2560,2480 2480,2520 2520,2520 2560,2520 2870,2540 2910,2540 2950,2540 2540,2550 2480,2560 2870,2580 2910,2580 2950,2580 2830,2730 2520,2920 2480,2960 2520,2960
  other v2: 2875,2021 2925,2021 2975,2021 2607,2196 2660,2250 2666.3,2280 2249,2378 2841.73,2410 2757.64,2423.54 2636.98,2692.7 2665,2885
  other v3: 2314.46,2491.01
  other v4: 2280,2090 2230,2150 2220,2635 2260,2660 2130,2680 2030,2690 2920,2870 2850,2890 2035,2956.73 2740,2956.73 2270,2960 2300,2960
NetAT1_1: AT1.1 AT1.4 L2.2 L3.1 | length 158
  Top Layer w20: L2.2 cw(c2846.73,2216.46) 2905.81,2275.53 L3.1 cw(c2855.46,2220.46) 2930,2220.46 2930,2190
NetC3_2: C3.2 L1.1 U1.H23 | length 246
  Top Layer w5: U1.H23 2540.48,2390.62 2540.48,2380.77 2543.98,2377.27 2543.98,2302.35 C3.2
  Top Layer w20: C3.2 2617.29,2229.04 ccw(c2663.27,2275.02) L1.1
NetC4_2: C4.2 L1.2 L2.1 | length 151.1
  Top Layer w24: L1.2 2767.97,2281.24 cw(c2813.27,2235.94) L2.1
NetC9_2: C9.2 U1.N24 | length 109.5
  Top Layer w8: C9.2 2440.98,2286.73 2468.46,2314.21 2471.64,2314.21 2491.31,2333.88 2491.31,2370.13 2490.16,2371.28 U1.N24
NetC10_2: C10.2 C13.2 C16.2 D3.4 J1.A4 J1.A9 L4.1 | length 530.9
  Top Layer w12: J1.A9 2161.32,2730.54 2161.32,2754.06 2165.02,2757.76 2165.02,2794.72 2164.43,2795.31 2164.43,2832.28 2171,2838.86 v4(2171,2842) ; v4@2172,2841 v4(2171,2842) ; v4(2301.46,2798.51) 2299.23,2800.74 2271.91,2800.74 2265.65,2807 2255.26,2807 2220.26,2842 v4(2171,2842) ; v4@2302,2801.28 2302,2790.74 2338.68,2754.07 2338.68,2730.54 J1.A4
  Bottom Layer w16: v4(2301.46,2798.51) 2301.46,2762.7 2302,2762.16 2302,2742.29 2289.47,2729.76 2289.47,2669.86 2309.02,2650.31 L4.1
NetC20_2: C20.2 U1.AC5 | length 161.1
  Top Layer w6: C20.2@2281.73,2595 2282.72,2595.98 2295.32,2595.98 2326.04,2626.71 2337.35,2626.71 2337.78,2627.14 2373.68,2627.14 2386.55,2614.27 2386.55,2585.23 2391.73,2580.05 U1.AC5
NetD1_A: D1.A R4.2 | length 54.7
  Top Layer w6: R4.2 2313.27,2064.42 D1.A
NetD2_A: D2.A R1.2 | length 54.7
  Top Layer w6: D2.A 2686.73,2064.42 R1.2
NetJ1_4: J1.4 R2.1 | length 125.6
  Top Layer w6: v2(2035,2854) 2035,2891.3 J1.4
  Bottom Layer w6: v2(2035,2854) R2.1
NetJ1_A1: J1.A1 J1.A12 L5.1 | length 694.8
  Top Layer w16: v4(2080,2694) 2101.48,2694 2124.02,2716.54 J1.A12 2124.02,2732.91 v4(2105.43,2751.5) 2105.43,2816.43 2162,2873 2217,2873 2223.16,2866.84 2223.7,2866.84 2254.55,2836 2341.02,2836 2394.58,2782.44 2394.58,2751.5 2379.8,2736.72 2379.8,2728.54 J1.A1
  Bottom Layer w16: L5.1 2074.99,2660.31 2074.99,2686.93 2080,2691.94 v4(2080,2694) 2081.46,2695.46 2081.46,2725.47 2105.43,2749.44 v4(2105.43,2751.5)
P0.00/XL1: C17.2 U1.D2 X2.2 | length 288.1
  Top Layer w5: U1.D2 2577.63,2609.38 2577.63,2619.23 2574.67,2622.19 2574.67,2633.83 2610.84,2670 2637.1,2670 2641.43,2674.33 2644.59,2674.33 2658.76,2688.5 2673.46,2688.5 2700.35,2715.39 2709.21,2724.25 2709.21,2740 2716.73,2747.52 C17.2
P0.01/XL2: C18.2 U1.F2 X2.1 | length 243.4
  Top Layer w5: U1.F2 2560.17,2609.38 2560.17,2619.23 2563.67,2622.73 2563.67,2641.67 2610.79,2688.79 2610.79,2706.54 2631.46,2727.2 X2.1 2631.46,2752.8 2603.27,2780.98 C18.2
P0.02/AIN0: P1.28 U1.A12 | length 276.3
  Top Layer w6: U1.A12 2628.22,2509.58 2648.05,2509.58 v2(2648.32,2509.32)
  Bottom Layer w6: P1.28 2618.11,2315.11 2661.17,2358.17 2661.17,2419.03 2661.17,2496.46 v2(2648.32,2509.32)
P0.03/AIN1: P1.24 U1.B13 | length 262.7
  Bottom Layer w6: P1.24 2580.66,2278.69 2580.66,2312.66 2637.17,2369.17 2637.17,2428.97 2637.17,2476.8 2615.08,2498.89 2609.38,2498.89 v3(2608.27,2500)
P0.04/AIN2: P2.20 U1.J1 | length 255.4
  Top Layer w6: U1.J1 2529.53,2680.33 2540.82,2691.62 2540.82,2818.09 2539.68,2819.23 2539.68,2828.95 v2(2537.82,2830.82)
  Bottom Layer w6: v2(2537.82,2830.82) 2539.37,2832.37 2539.37,2835.01 P2.20
P0.05/AIN3: P2.25 U1.K2 | length 147.6
  Bottom Layer w6: v3(2519.68,2608.27) 2520.8,2609.38 2520.8,2613.6 2598.43,2691.23 P2.25
P0.06: P2.26 TP9.1 U1.L1 | length 905
  Top Layer w6: U1.L1 2509.84,2677.62 2528.82,2696.59 2528.82,2813.12 2518.94,2823 2518.94,2838.64 2542.31,2862 2694,2862 v2(2704,2872) 2753.69,2872 2806.69,2819 2929,2819 TP9.1
  Bottom Layer w6: P2.26 2600.35,2878.69 2600.35,2900.35 2629.87,2929.87 2656.27,2929.87 2665.02,2921.13 2715.57,2921.13 2734.87,2901.82 2734.87,2886.18 2720.87,2872.18 2704.18,2872.18 v2(2704,2872)
P0.07: P2.23 U1.M2 U2.2 | length 608.7
  Bottom Layer w6: v3(2500,2608.27) 2501.11,2609.38 2501.11,2613.6 2578.74,2691.23 P2.23 ; v3@2501.11,2608.27 2501.11,2602.93 2512.68,2591.36 2618.7,2591.36 2636.95,2609.61 2776.64,2609.61 2840.03,2673 2877,2673 2889.25,2660.75 U2.2
P0.08: C28.2 P2.24 SW2.2 U1.N1 | length 726.1
  Top Layer w6: U1.N1 2490.16,2682.86 2516,2708.7 2516,2808.97 2506.94,2818.03 2506.94,2843.61 2538.34,2875 2624.57,2875 2653.2,2903.63 2654.18,2903.63 2672.84,2922.28 v2(2672.84,2940) 2689.57,2923.27 C28.2
  Bottom Layer w6: P2.24 2578.74,2919.72 2572.24,2926.22 2572.24,2951.5 2588.5,2967.76 2661.24,2967.76 2672.84,2956.17 v2(2672.84,2940)
P0.09/NFC1: AT2.2 CT1.2 CT2.2 P1.17 U1.L24 | length 450.7
  Top Layer w8: AT2.2 2480.32,2086.68 2471.73,2095.27 CT2.2 CT1.2 ; v2(2491,2211) 2472.73,2211 CT1.2 ; U1.L24 2509.84,2332.61 2471.73,2294.5 CT1.2
  Bottom Layer w8: v2(2491,2211) 2505.62,2196.38 2505.62,2183.27 2519.68,2169.21 P1.17
P0.10/NFC2: AT2.1 CT3.1 CT4.1 P1.19 U1.J24 | length 421
  Top Layer w8: AT2.1 2519.68,2101.68 2528.27,2110.27 CT4.1 2528.13,2150.13 2528.13,2188.87 v2(2528,2189) 2528.13,2189.13 2528.13,2210.85 2528.27,2210.98 2487,2252.25 2487,2289.97 2529.53,2332.5 U1.J24
  Bottom Layer w8: v2(2528,2189) 2528,2186.9 2539.37,2175.53 P1.19
P0.11: P2.19 U1.T2 | length 147.6
  Bottom Layer w6: v3(2460.63,2608.27) 2461.74,2609.38 2461.74,2615.93 2539.37,2693.56 P2.19
P0.12: P2.16 U1.U1 | length 292.8
  Top Layer w6: U1.U1 2450.79,2677.43 2490.1,2716.74 2490.1,2737.04 2490.1,2783.26 2483.45,2789.9 2482.67,2789.9 2471.62,2800.96 2471.62,2818.33 2479.14,2825.85 v2(2479.14,2828.49)
  Bottom Layer w6: v2(2479.14,2828.49) 2492.49,2828.49 2500,2836 P2.16
P0.13: P2.9 U1.AD8 | length 202.6
  Bottom Layer w6: v3(2372.05,2549.21) 2395.72,2572.89 2395.72,2648.34 2440.94,2693.56 P2.9
P0.14: P2.11 U1.AC9 | length 212.4
  Bottom Layer w6: v3(2391.73,2539.37) 2407.72,2555.36 2407.72,2640.65 2460.63,2693.56 P2.11
P0.15: P2.5 U1.AD10 | length 258.7
  Top Layer w6: v2(2336.27,2528) 2337.03,2528.76 2371.28,2528.76 U1.AD10
  Bottom Layer w6: v2(2336.27,2528) 2336.27,2529.51 2343.14,2536.39 2343.14,2561.19 2365,2583.04 2365,2655.02 2401.57,2691.6 P2.5
P0.16: P2.13 U1.AC11 | length 242.7
  Bottom Layer w6: v3(2391.73,2519.68) 2392.84,2520.8 2397.07,2520.8 2419.72,2543.45 2419.72,2632.97 2480.31,2693.56 P2.13
P0.17: P2.7 U1.AD12 | length 289.2
  Top Layer w6: v2(2340.49,2502.51) 2343.12,2502.51 2350.45,2509.84 U1.AD12
  Bottom Layer w6: v2(2340.49,2502.51) 2341.21,2502.51 2355.14,2516.45 2355.14,2556.22 2381.89,2582.96 2381.89,2653.1 2421.26,2692.47 P2.7
P0.18/RESET: C27.1 P1.5 R5.2 SW1.1 TP15.1 U1.AC13 | length 1758.7
  Top Layer w6: v2(2807,2858) 2807,2939.83 SW1.1
  VCC w6: v3(2391.73,2500) 2395.96,2500 2408.64,2512.68 2408.64,2580.18 2462.45,2634 2633.17,2634 2645.56,2621.61 2672.72,2621.61 2740,2688.9 2740,2725 2769,2754 v2(2771,2754)
  Bottom Layer w6: TP15.1 2140,2076.04 2178,2114.04 2178,2218.52 2281,2321.52 2308,2321.52 ; v3(2391.73,2500) 2390.62,2498.89 2386.4,2498.89 2373,2485.49 2373,2467.35 2308,2402.35 2308,2321.52 ; P1.5 2401.57,2168 2401.57,2168.85 2369.43,2201 2345.06,2201 2324,2222.06 2324,2305.52 2308,2321.52 ; v2(2771,2754) 2807,2790 v2(2807,2858) 2871.27,2858 2913.47,2900.2 2914.46,2900.2 2923.27,2909.02 R5.2 C27.1
P0.19: P2.15 U1.AC15 | length 290.2
  Bottom Layer w6: v3(2391.73,2480.31) 2392.84,2481.43 2397.07,2481.43 2431.72,2516.08 2431.72,2623.64 2500,2691.92 P2.15
P0.20: P1.7 U1.AD16 | length 612.3
  Top Layer w6: v2@2294.29,2445.87 2296.17,2447.75 2339.75,2447.75 2362.47,2470.47 U1.AD16 ; v2@2304.79,2177.79 v2(2305,2178)
  VCC w6: v2(2287,2444) 2288.87,2445.87 2294.29,2445.87 2296.17,2447.75 2311.81,2447.75 2332,2427.56 2332,2355 2321,2344 2321,2279 2305,2263 v2(2305,2178)
  Bottom Layer w6: v2(2305,2178) 2305,2139 2358,2086 2411,2086 2421.26,2096.26 P1.7
P0.21: P2.17 U1.AC17 | length 318.1
  Bottom Layer w6: v3(2391.73,2460.63) 2392.84,2461.74 2397.07,2461.74 2443.72,2508.4 2443.72,2616.72 2519.68,2692.68 P2.17
P0.22: P1.9 U1.AD18 | length 626.6
  Top Layer w6: v2(2303.99,2428.87) 2324.28,2428.87 2328.03,2425.13 2345.69,2425.13 2371.35,2450.79 U1.AD18
  VCC w6: v2(2286.13,2196.67) 2286.67,2197.21 2286.67,2214.85 2289,2217.18 2289,2232.82 2267,2254.82 2267,2310.06 2320,2363.06 2320,2412.86 v2(2303.99,2428.87)
  Bottom Layer w6: v2(2286.13,2196.67) 2286.13,2139.87 2352,2074 2419,2074 2440.94,2095.94 P1.9
P0.23: P1.11 U1.AC19 | length 473.1
  Bottom Layer w6: v3(2391.73,2440.94) 2363.57,2440.94 2320,2397.37 2320,2330 2336.28,2313.72 2336.28,2226.75 2349.03,2214 2436,2214 2460.63,2189.37 2460.63,2168 P1.11
P0.24: P1.13 U1.AD20 | length 692.8
  Top Layer w6: v2@2268.35,2225 v2(2270.13,2225) ; v2(2287,2410) 2350.25,2410 2371.35,2431.1 U1.AD20
  VCC w6: v2(2270.13,2225) 2267.49,2225 2255,2237.49 2255,2315.03 2308,2368.03 2308,2389 v2(2287,2410)
  Bottom Layer w6: v2(2270.13,2225) 2270.13,2206.82 2266.84,2203.53 2266.84,2142.19 2347.03,2062 2449,2062 2480.31,2093.31 P1.13
P0.25: P1.15 U1.AC21 | length 461.9
  Bottom Layer w6: v3(2391.73,2421.26) 2360.86,2421.26 2333,2393.4 2333,2389.82 2332.07,2388.89 2332.07,2373.25 2333,2372.32 2333,2336 2348.28,2320.72 2348.28,2231.72 2354,2226 2442,2226 2500,2168 P1.15
P0.26: P2.22 TP8.1 U1.G1 | length 980.4
  Top Layer w6: U1.G1 2549.21,2683.04 2556.69,2690.52 2556.69,2823.39 2583.31,2850 v2(2749,2850) 2796,2803 2877,2803 2910,2770 TP8.1
  Bottom Layer w6: P2.22 2559.06,2955.29 2583.53,2979.76 2673.9,2979.76 2749,2904.66 v2(2749,2850)
P0.27: P2.27 U1.H2 U2.3 | length 555.4
  Bottom Layer w6: v3(2539.37,2608.27) 2616.27,2608.27 2629.61,2621.61 ; P2.27 2618.11,2675.89 2629.61,2664.39 2629.61,2621.61 ; U2.3 2920.75,2663.91 2899.65,2685 2833,2685 2769.61,2621.61 2629.61,2621.61
P0.28/AIN4: P1.26 U1.B11 | length 283.4
  Bottom Layer w6: P1.26 2598.43,2313.43 2649.17,2364.17 2649.17,2424 2649.17,2481.77 2625.17,2505.77 2625.17,2507 2615.27,2516.91 2612.62,2516.91 2609.84,2519.68 v3(2608.27,2519.68)
P0.29/AIN5: P1.27 U1.A10 | length 492.1
  Top Layer w6: U1.A10 2657.06,2529.53 2660.06,2532.53 2677.27,2532.53 v2(2677.88,2533.14)
  Bottom Layer w6: P1.27 2618.11,2178.11 2685,2245 2685,2272.01 2685.17,2272.18 2685.17,2523.21 2677.88,2530.5 v2(2677.88,2533.14)
P0.30/AIN6: P1.30 U1.B9 | length 325.6
  Bottom Layer w6: v3(2608.27,2539.37) 2644.95,2539.37 2667.19,2517.13 2667.19,2515.65 2673.17,2509.67 2673.17,2351.17 2637.8,2315.8 P1.30
P0.31/AIN7: P1.29 U1.A8 | length 520.2
  Top Layer w6: U1.A8 2655.34,2549.21 2658.14,2552.01 2691.07,2552.01 v2(2691.85,2551.23)
  Bottom Layer w6: P1.29 2637.8,2180.82 2697,2240.03 2697,2267.04 2697.17,2267.21 2697.17,2543.27 2691.85,2548.59 v2(2691.85,2551.23)
P1.00: P1.2 U1.AD22 | length 148.5
  Top Layer w6: v2(2350.94,2381.07) 2351.74,2381.87 2351.74,2391.81 2371.35,2411.42 U1.AD22
  Bottom Layer w6: v2(2350.94,2381.07) 2350.87,2381 2350.87,2337.13 2362.1,2325.9 2362.1,2276.87 P1.2
P1.01: P1.4 U1.Y23 | length 137.7
  Bottom Layer w6: P1.4 2381.89,2310.75 2374.16,2318.48 2374.16,2344.63 v3(2421.26,2391.73)
P1.02: P1.6 U1.W24 | length 114.6
  Top Layer w6: v2(2393.03,2326.97) 2415,2348.94 2415,2355.25 2431.1,2371.35 U1.W24
  Bottom Layer w6: v2(2393.03,2326.97) 2393.03,2324.33 2401.57,2315.79 P1.6
P1.03: P1.8 U1.V23 | length 134.9
  Bottom Layer w6: P1.8 2421.26,2326.21 2407,2340.47 2407,2353.56 2439.83,2386.4 2439.83,2390.62 v3(2440.94,2391.73)
P1.04: P1.10 U1.U24 | length 105.4
  Top Layer w6: v2(2433.69,2346.28) 2435.51,2348.1 2435.51,2356.07 2450.79,2371.35 U1.U24
  Bottom Layer w6: v2(2433.69,2346.28) 2433.64,2346.24 2433.64,2321.27 2440.94,2313.97 P1.10
P1.05: P1.12 U1.T23 | length 121.6
  Bottom Layer w6: P1.12 2460.63,2312.19 2452.56,2320.26 2452.56,2351.4 2460.63,2359.47 v3(2460.63,2391.73)
P1.06: P1.14 U1.R24 | length 99.4
  Top Layer w6: U1.R24 2470.95,2371.57 2470.95,2342.59 v2(2471.43,2342.11)
  Bottom Layer w6: v2(2471.43,2342.11) 2471.43,2324.54 2480.31,2315.66 P1.14
P1.07: P1.16 U1.P23 | length 123.1
  Bottom Layer w6: v3(2480.31,2391.73) 2480.31,2365.92 2490.31,2355.93 2490.31,2331.69 2500,2322 P1.16
P1.08: P2.21 U1.P2 U2.1 | length 563.5
  Bottom Layer w6: P2.21 2559.06,2691.23 2481.43,2613.6 2481.43,2609.38 v3(2480.31,2608.27) 2481.43,2607.16 2481.43,2602.93 2505.36,2579 2623.31,2579 2641.92,2597.61 2781.61,2597.61 2820.77,2636.77 U2.1
P1.09: P2.18 U1.R1 | length 279.6
  Top Layer w6: U1.R1 2470.47,2680.14 2503,2712.67 2503,2796.27 v2(2490.49,2808.78)
  Bottom Layer w6: v2(2490.49,2808.78) 2519.68,2837.97 P2.18
P1.10: P1.25 U1.A20 U2.7 | length 901.8
  Top Layer w6: U1.A20 2636.48,2431.1 2710.37,2504.99 2841.59,2504.99 2889.79,2456.79 2889.79,2445.54 v2(2889.25,2445)
  Bottom Layer w6: P1.25 2598.43,2095.57 2609,2085 2644,2085 2656,2097 2656,2182 2889.25,2415.25 v2(2889.25,2445) U2.7
P1.11: P1.20 U1.B19 | length 192.7
  Bottom Layer w6: P1.20 2539.37,2344.34 2608.27,2413.24 v3(2608.27,2440.94)
P1.12: P1.18 U1.B17 | length 223
  Bottom Layer w6: P1.18 2519.68,2341.63 2591.36,2413.3 2591.36,2447.95 2602.93,2459.52 2607.16,2459.52 v3(2608.27,2460.63)
P1.13: P1.23 U1.A16 U2.6 | length 975.4
  Top Layer w6: U1.A16 2658.87,2470.47 2705.39,2516.99 2846.56,2516.99 2918.55,2445 v2(2920.75,2445)
  Bottom Layer w6: P1.23 2578.74,2091.26 2597,2073 2650.51,2073 2670.97,2093.46 2670.97,2178.97 2920.13,2428.13 2920.13,2444.38 v2(2920.75,2445) U2.6
P1.14: D2.K P1.22 U1.B15 | length 486.7
  Top Layer w6: v2(2585,2187) 2585,2093.67 2619.69,2058.98 D2.K
  Bottom Layer w6: v2(2585,2187) 2559.06,2212.94 P1.22 2559.06,2347.06 2625.17,2413.17 2625.17,2433.94 2625.17,2471.83 2617.8,2479.2 2609.38,2479.2 v3(2608.27,2480.31)
P1.15: P1.21 U1.A14 U2.5 | length 1066.2
  Top Layer w6: U1.A14 2628.41,2489.7 2661.13,2489.7 2700.42,2528.99 2851.53,2528.99 2915.83,2464.7 2932.54,2464.7 v2(2952.24,2445)
  Bottom Layer w6: P1.21 2559.06,2086.94 2585,2061 2659,2061 2683.78,2085.78 2683.78,2174.81 2952.24,2443.27 v2(2952.24,2445) U2.5
SWDCLK: P1.1 TP14.1 U1.AA24 | length 628.3
  Top Layer w6: v2(2286.25,2266.9) 2307.71,2266.9 2351.91,2311.09 2351.91,2312.54 2397,2357.63 2397.7,2357.63 2406.15,2366.08 2411.42,2371.39 U1.AA24
  Bottom Layer w6: TP14.1 2240,2077 2202,2115 2202,2208 2260,2266 2285.36,2266 v2(2286.25,2266.9) ; v2@2286.25,2266 2300,2252.25 2300,2210.03 2333.03,2177 2353,2177 2362.2,2167.8 P1.1
SWDIO: P1.3 TP13.1 U1.AC24 | length 637.8
  Top Layer w6: v2(2302.13,2291) 2303.99,2292.87 2312.55,2292.87 U1.AC24
  Bottom Layer w6: TP13.1 2190,2212.97 2269.13,2292.1 2301.03,2292.1 2312,2281.13 2312,2215 2338,2189 2364.45,2189 2381.89,2171.57 2381.89,2168 P1.3
UD_N: D3.2 J1.A7 J1.B7 P2.10 R7.2 | length 600.4
  Top Layer w8: R7.2 cw(c2175,2629.11) 2173.32,2627.43 2166.37,2634.54 2166.08,2634.91 cw(c2172.42,2639.8) 2166.04,2634.97 cw(c2180.28,2645.61) 2162.5,2645.61 2162.5,2649.67 cw(c2170.5,2649.67) 2170.1,2657.66 2191.24,2658.73 ccw(c2188.85,2706.63) 2222.76,2672.71 2223.54,2673.49 ccw(c2207.98,2689.04) 2227.47,2678.83 cw(c2236.38,2674.29) 2229.64,2681.68 ccw(c2214.69,2697.82) 2236.52,2695.05 ; J1.A7 2238.25,2708.72 2236.52,2695.05 ; v2(2270,2775) cw(c2247,2752) 2279.53,2752 J1.B7 2278.18,2708.72 cw(c2247,2718) 2275.75,2702.79 ccw(c2282.84,2699.08) 2275.25,2701.62 cw(c2265.75,2704.72) 2265.75,2694.72 2253.94,2694.72 cw(c2253.94,2704.72) 2252.64,2694.81 ccw(c2251.66,2686.87) 2251.72,2694.87 2236.52,2695.05
  Bottom Layer w8: D3.2 D3.2@2252.82,2810.06 ; v2(2270,2775) 2270,2777.1 2263.09,2784.01 2263.09,2799.79 2255.28,2807.6 2258.97,2811.29 2258.97,2826.16 2263.65,2830.84 2279.15,2830.84 2287.66,2822.32 2334.49,2822.32 2340.72,2816.1 2355.26,2816.1 2377.36,2794 2410.58,2794 2434.85,2818.27 2434.85,2837.76 2440.94,2843.86 P2.10
UD_P: D3.3 J1.A6 J1.B6 P2.8 R6.2 | length 666.4
  Top Layer w8: R6.2 ccw(c2135,2629.11) 2136.68,2627.43 2140.09,2630.84 2143.15,2634.54 ccw(c2122.22,2648.72) 2147.07,2644.06 2148.88,2653.72 cw(c2170.5,2649.67) 2169.39,2671.64 2190.54,2672.71 ccw(c2188.85,2706.63) 2212.87,2682.62 2213.67,2683.42 ccw(c2207.98,2689.04) 2215.1,2685.39 cw(c2236.38,2674.29) 2217.7,2689.37 ; v2(2210,2780) cw(c2184.72,2754.72) 2220.47,2754.72 ; 2217.71,2689.38 ccw(c2211.45,2694.35) 2218.9,2691.43 ccw(c2197.24,2699.85) 2220.47,2699.85 J1.B6 2220.47,2754.72 ; J1.A6 2257.94,2729.27 2257.94,2752.27 2250.21,2760 2225.75,2760 2220.47,2754.72
  Bottom Layer w8: D3.3 D3.3@2174.57,2807.6 ; v2(2210,2780) 2208.52,2781.48 2200.68,2781.48 D3.3@2174.57,2807.6 ; P2.8 2420.85,2876.36 2420.85,2824.07 2404.78,2808 2383.16,2808 2361.06,2830.1 2346.51,2830.1 2340.29,2836.32 2293.46,2836.32 2284.94,2844.84 2211.81,2844.84 D3.3@2174.57,2807.6
VBUS: C19.2 C21.2 D4.1 L4.2 P2.1 P2.3 Q1.1 R3.2 TP6.1 U1.AD2 | length 278.3
  Top Layer w11: v2(2344.98,2608.27) U1.AD2
  Bottom Layer w16: TP6.1 2130.2,2510 2140.2,2520 D4.1 ; L4.2 2320.31,2599.99 2338.63,2599.99 2344.98,2606.34 v2(2344.98,2608.27) ; v2@2348,2609.36 2348,2692.04 2348,2699.43 2362.2,2713.64 P2.1
VDD: C23.2 C24.2 P2.12 P2.14 R1.1 R4.1 R5.1 SB1.1 SB2.1 TP2.1 TP3.1 TP12.1 U3.5 | length 654.4
  Top Layer w6: SB1.1 2164.3,2197.3 2231.73,2197.3 2274.03,2155 2311,2155 2337.92,2128.08 2337.92,2118.44 2346.73,2109.63 R4.1@2346.73,2100 ; v1@2180,2249.03 v1(2180,2250) ; R1.1@2653.27,2105 2656,2107.73 2656,2127 2664,2135 v2(2708,2135)
  Top Layer w16: TP2.1 2065.65,2200 2076.73,2211.09 C23.2 2076.81,2260.08 2076.81,2299.92 C24.2 2076.73,2348.91 2065.65,2360 TP3.1
  Bottom Layer w12: v1(2450.85,2799.24) 2450.85,2801.32 2450.85,2831.13 2460.63,2840.91 P2.12 ; v2(2730,2565) 2730,2563.99 2738.4,2555.59 SB2.1 ; R5.1 2956.87,2909.87 2956.87,2875.13 v2(2957,2875)
  other v1: 2140,2250 2180,2290 2400,2960 2440,2960
VDD_Flash: C22.1 SB2.2 SB3.2 U2.8
VDD_nRF: C6.2 C7.2 C8.2 C12.2 C14.2 P2.30 SB1.2 SB3.1 TP1.1 U1.A22 U1.AD14 U1.AD23 U1.B1 U1.W1 U1.Y2 | length 2561.3
  Top Layer w10: C7.2 2271,2484.27 v1(2271,2464) 2271.87,2464.87 2336.87,2464.87 2362,2490 2371.89,2490 U1.AD14 ; v1(2287.16,2378) 2288.58,2376.58 2288.58,2358.15 C8.2 2356.13,2356.73 2371.89,2372.49 2371.89,2373.49 2371.89,2391.57 U1.AD23 U1.AD23@2372.18,2391.87 ; v1(2315.32,2685.68) C6.2 2404.06,2655 U1.W1 2431.26,2627.79 2431.26,2618.49 2421.26,2608.49 U1.Y2 ; U1.B1 2640.84,2627.95 2662.47,2649.59 v2@2674,2649.59 ; U1.A22@2628.11,2411.58 2647.43,2411.58 v1(2720,2484.15) 2780.1,2484.15 2808.27,2455.98 C12.2 ; v2(2674.41,2650) C14.2
  Top Layer w20: TP1.1@2074.59,2150 TP1.1 2135.2,2150 SB1.2
  VCC w16: v1(2315.32,2685.68) 2503.32,2685.68 2535,2654 2639.86,2654 v2(2653.37,2640.49) 2664.9,2640.49 v2(2674.41,2650)
  VCC w20: TP1.1 2146,2150 2236,2240 2236,2322.9 2287.16,2374.05 v1(2287.16,2378)
  GND w10: v2(2674.41,2650) 2674.52,2650 2750.87,2573.65 2750.87,2515.02 v1(2720,2484.15)
  GND w16: v1(2271,2464) 2271,2487.07 2295,2511.07 2295,2665.37 v1(2315.32,2685.68)
  Bottom Layer w10: v1(2271,2464) 2271,2461.38 2266.13,2456.51 2266.13,2399.03 v1(2287.16,2378) ; P2.30 2637.8,2842.2 2647.16,2832.84 2669.46,2832.84 2695,2807.3 2695,2670.59 v2(2674.41,2650) 2672.85,2650 2664.44,2641.59 v2@2654.47,2641.59 ; v1(2720,2484.15) 2720.85,2485 2734.8,2485
VIN: P2.2 P2.4 Q1.3 TP5.1 | length 866.6
  VCC w32: TP5.1 2130,2410 2175.02,2455.02 2175.02,2790.09 2210,2825.08 2210,2885.86 2244.14,2920 2330,2920
  Bottom Layer w16: TP5.1 2080,2410 2110,2380 2182.81,2380 2190,2372.81 Q1.3
  other v1: 2367,2932 2330,2950
VLDO: C25.2 C26.2 D4.2 Q1.2 TP4.1 U3.1 U3.3 | length 437.5
  Top Layer w16: TP4.1 2115,2460 2120,2455 2198.27,2455 C26.2
  Bottom Layer w16: TP4.1 2081.82,2460 2136.82,2405 2202.4,2405 2227.4,2430 Q1.2 2227.4,2511.66 2235.74,2520 D4.2
XC1: C1.1 U1.B24 X1.1 | length 224.3
  Top Layer w6: U1.B24 2653.17,2372.05 2676.97,2395.84 2731.14,2395.84 2738.09,2388.89 2738.09,2387.97 2757.64,2368.43 X1.1 2806.81,2366.46 C1.1
XC2: C2.1 U1.A23 X1.3 | length 231.4
  Top Layer w6: U1.A23 2655.89,2391.73 2672,2407.84 2698.63,2407.84 2712.36,2421.57 2712.36,2425.51 2731.91,2445.06 2731.91,2445.97 2737.18,2451.24 2768.96,2451.24 2778.1,2451.24 2787.46,2441.89 2787.46,2431.8 2808.27,2410.98 C2.1
pads on no net: J1.0 J1.1 J1.2 J1.3 J1.A5 J1.A8 J1.B5 J1.B8 U1.AB2 U3.4
copper on no net:
  other v5: 2600,2940 2880,2940

## Polygon pours and split planes (outlines as drawn)
VDD on VCC "NONET_L-01_P-001" (solid, pour order 15): 2000,2000 3000,2000 3000,3000 2000,3000
VIN on VCC "NONET_L-01_P-001" (solid, pour order 0): 2320,2960 2320,2904 2380,2904 2380,2930 2350,2960
GND on Bottom Layer "NONET_L-01_P-001" (solid, pour order 17): 3000,2000 3000,3000 2000,3000 2000,2000
NetC10_2 on Bottom Layer "NONET_L-01_P-001" (solid, pour order 14): 2080,2790 2180,2790 2225,2835 2225,2940 2195,2970 2160,2970 2080,2890
VBUS on Bottom Layer "NONET_L-01_P-001" (solid, pour order 16): 2010,2455.28 2265.28,2455.28 2345,2535 2345,2610 2340,2615 2165,2615 2085,2535 2010,2535
VDD on Bottom Layer "NONET_L-01_P-001" (solid, pour order 9): 2377,2963 2386,2972 2432,2972 2488,2916 2488,2811 2466,2789 2453,2789 2377,2865
VIN on Bottom Layer "NONET_L-01_P-001" (solid, pour order 1): 2317,2958 2317,2899 2372,2844 2389,2844 2389,2916.23 2347.23,2958
VBUS on Bottom Layer "NONET_L-01_P-001" (solid, pour order 18): 2340,2749 2389,2749 2389,2704 2356,2671 2340,2671
VDD_Flash on Bottom Layer "NONET_L-01_P-001" (solid, pour order 4): 2765,2580 2765,2430 2870,2430 2870,2510 2800,2580
GND on Top Layer "NONET_L-01_P-001" (solid, pour order 12): 2000,3000 2000,2000 3000,2000 3000,3000
VLDO on Top Layer "NONET_L-01_P-001" (solid, pour order 7): 2010,2435 2100,2435 2125,2410 2125,2350 2230,2350 2230,2495 2010,2495
VDD on Top Layer "NONET_L-01_P-001" (solid, pour order 6): 2010,2175 2135,2175 2230,2270 2230,2315 2160,2385 2010,2385
GND on Top Layer "NONET_L-01_P-001" (solid, pour order 5): 2010,2235 2055,2235 2055,2325 2010,2325
GND on GND "NONET_L-01_P-001" (solid, pour order 13): 2000,2000 2000,3000 3000,3000 3000,2000

## Keep-outs
Keep-Out Layer:
  the board outline again, w6

## Other copper
Top Layer:
  rectangle net GND: 2956.09,2021 2983.65,2038
  rectangle net GND: 2956,2216 2983.65,2232
  pour cut-out: 2530,2400 2570,2400 2570,2355 2625,2300 2625,2225 2530,2225
Bottom Layer:
  pour cut-out: 2495,2835 2495,2850 2610,2850 2610,2835
  pour cut-out: 2355,2835 2355,2850 2385,2850 2385,2835
  pour cut-out: 2355,2750 2355,2765 2631.03,2765 2631.03,2750
  pour cut-out: 2355,2235 2355,2250 2645,2250 2645,2235
  pour cut-out: 2355,2150 2355,2165 2645,2165 2645,2150
  pour cut-out: 2136.22,2769.68 2363.78,2769.68 2363.78,2828 2136,2828

## Silkscreen, mask and mechanical layers (free items; w line width, h text height)
Top Overlay:
  lines w6: 2740,2140 2930,2140 ; 2870,2570 2850,2590 ; 2990,2590 2850,2590 ; 2850,2590 2870,2610 2850,2590
  text "P008" at 2539.93,2848.8 h36
  text "RST" at 2835.95,2848.8 h36
  text "P006" at 2765.57,2802 h36
  text "P026" at 2765.57,2752 h36
  text "G" at 2858.29,2702 h36
  text "BY" at 2656,2593.01 h36
  text "KEFAN" at 2656,2543.01 h36
  text "GND" at 2882.13,2542 h36
  text "nRF52" at 2656,2493.01 h36
  text "VBUS" at 2851.97,2492 h36
  text "kernel" at 2656,2448.01 h36
  text "VLDO" at 2857.97,2442 h36
  text "VIN" at 2910.41,2392 h36
  text "VDD" at 2885.9,2342 h36
  text "JAN 12" at 2742.59,2198.01 h36
  text "VDD" at 2196,2172 h36
  text "2024" at 2769.07,2148.01 h36
  text "PWR" at 2306.48,2136 h36
  text "P114" at 2603.45,2136 h36
  text "nRF" at 2196,2122 h36
  text "GND" at 2758,2026 h36 r90
  text "VDD" at 2808,2026 h36 r90
  text "RST" at 2858,2026 h36 r90
  text "SWD" at 2908,2026 h36 r90
  text "CLK" at 2958,2026 h36 r90
Bottom Overlay:
  lines w6: 2975,2079 2975,2440 2990,2410
  text "VDD" at 2693.57,2527 h36
  text "nRF" at 2693.57,2467 h36
  text "IO0-P115" at 2964,2332 h36
  text "IO1-P007" at 2964,2282 h36
  text "IO2-P027" at 2964,2232 h36
  text "IO3-P110" at 2964,2182 h36
  text "CLK-P113" at 2964,2132 h36
  text "CS-P108" at 2964,2082 h36
Board Shape: